# Altium PCB ArgoFC.PcbDoc (part 1 of 5)
Units mm, origin at the board's own origin, x right, y up, seen from the top; angles counter-clockwise.
Board outline 177.8 x 177.8 mm, 4 copper layers (Top Layer, GND Plane, PWR Plane, Bottom Layer), stack 0.603 mm thick; 373 components, 236 nets, 1289 pads, 686 vias.
Unrouted connection lines stored in the file: 16.
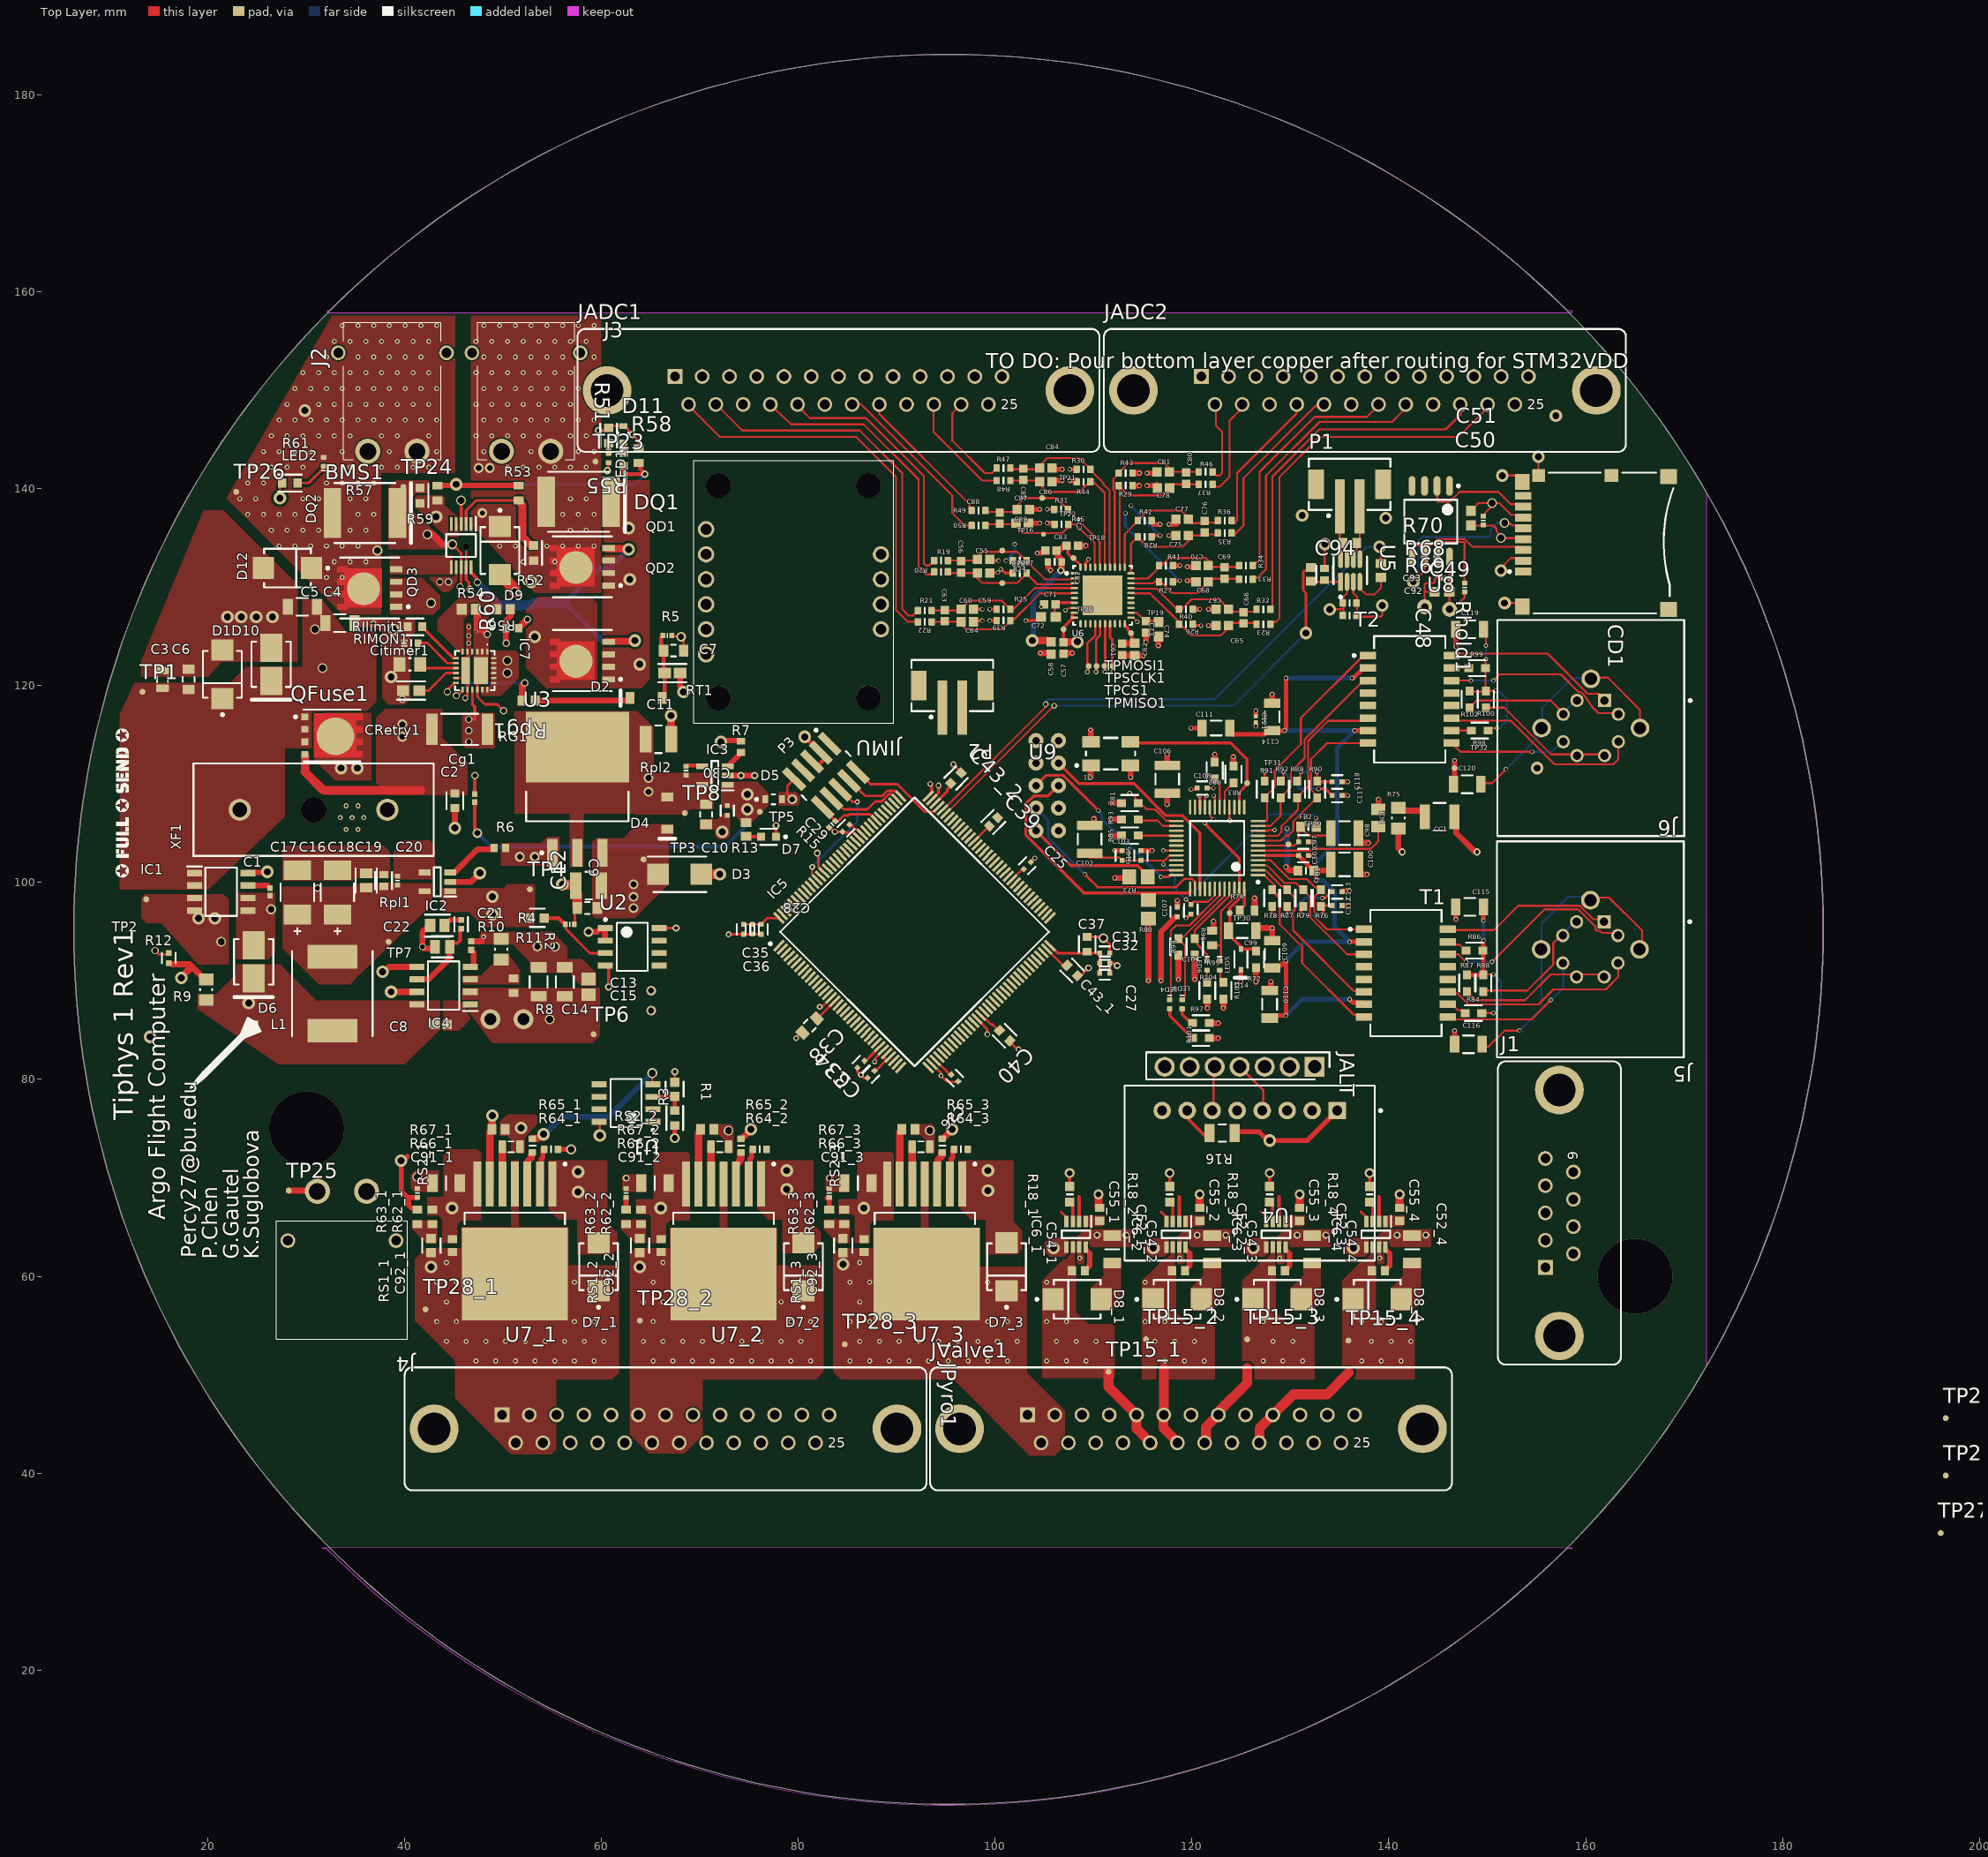
[diagram p0: Top Layer view]
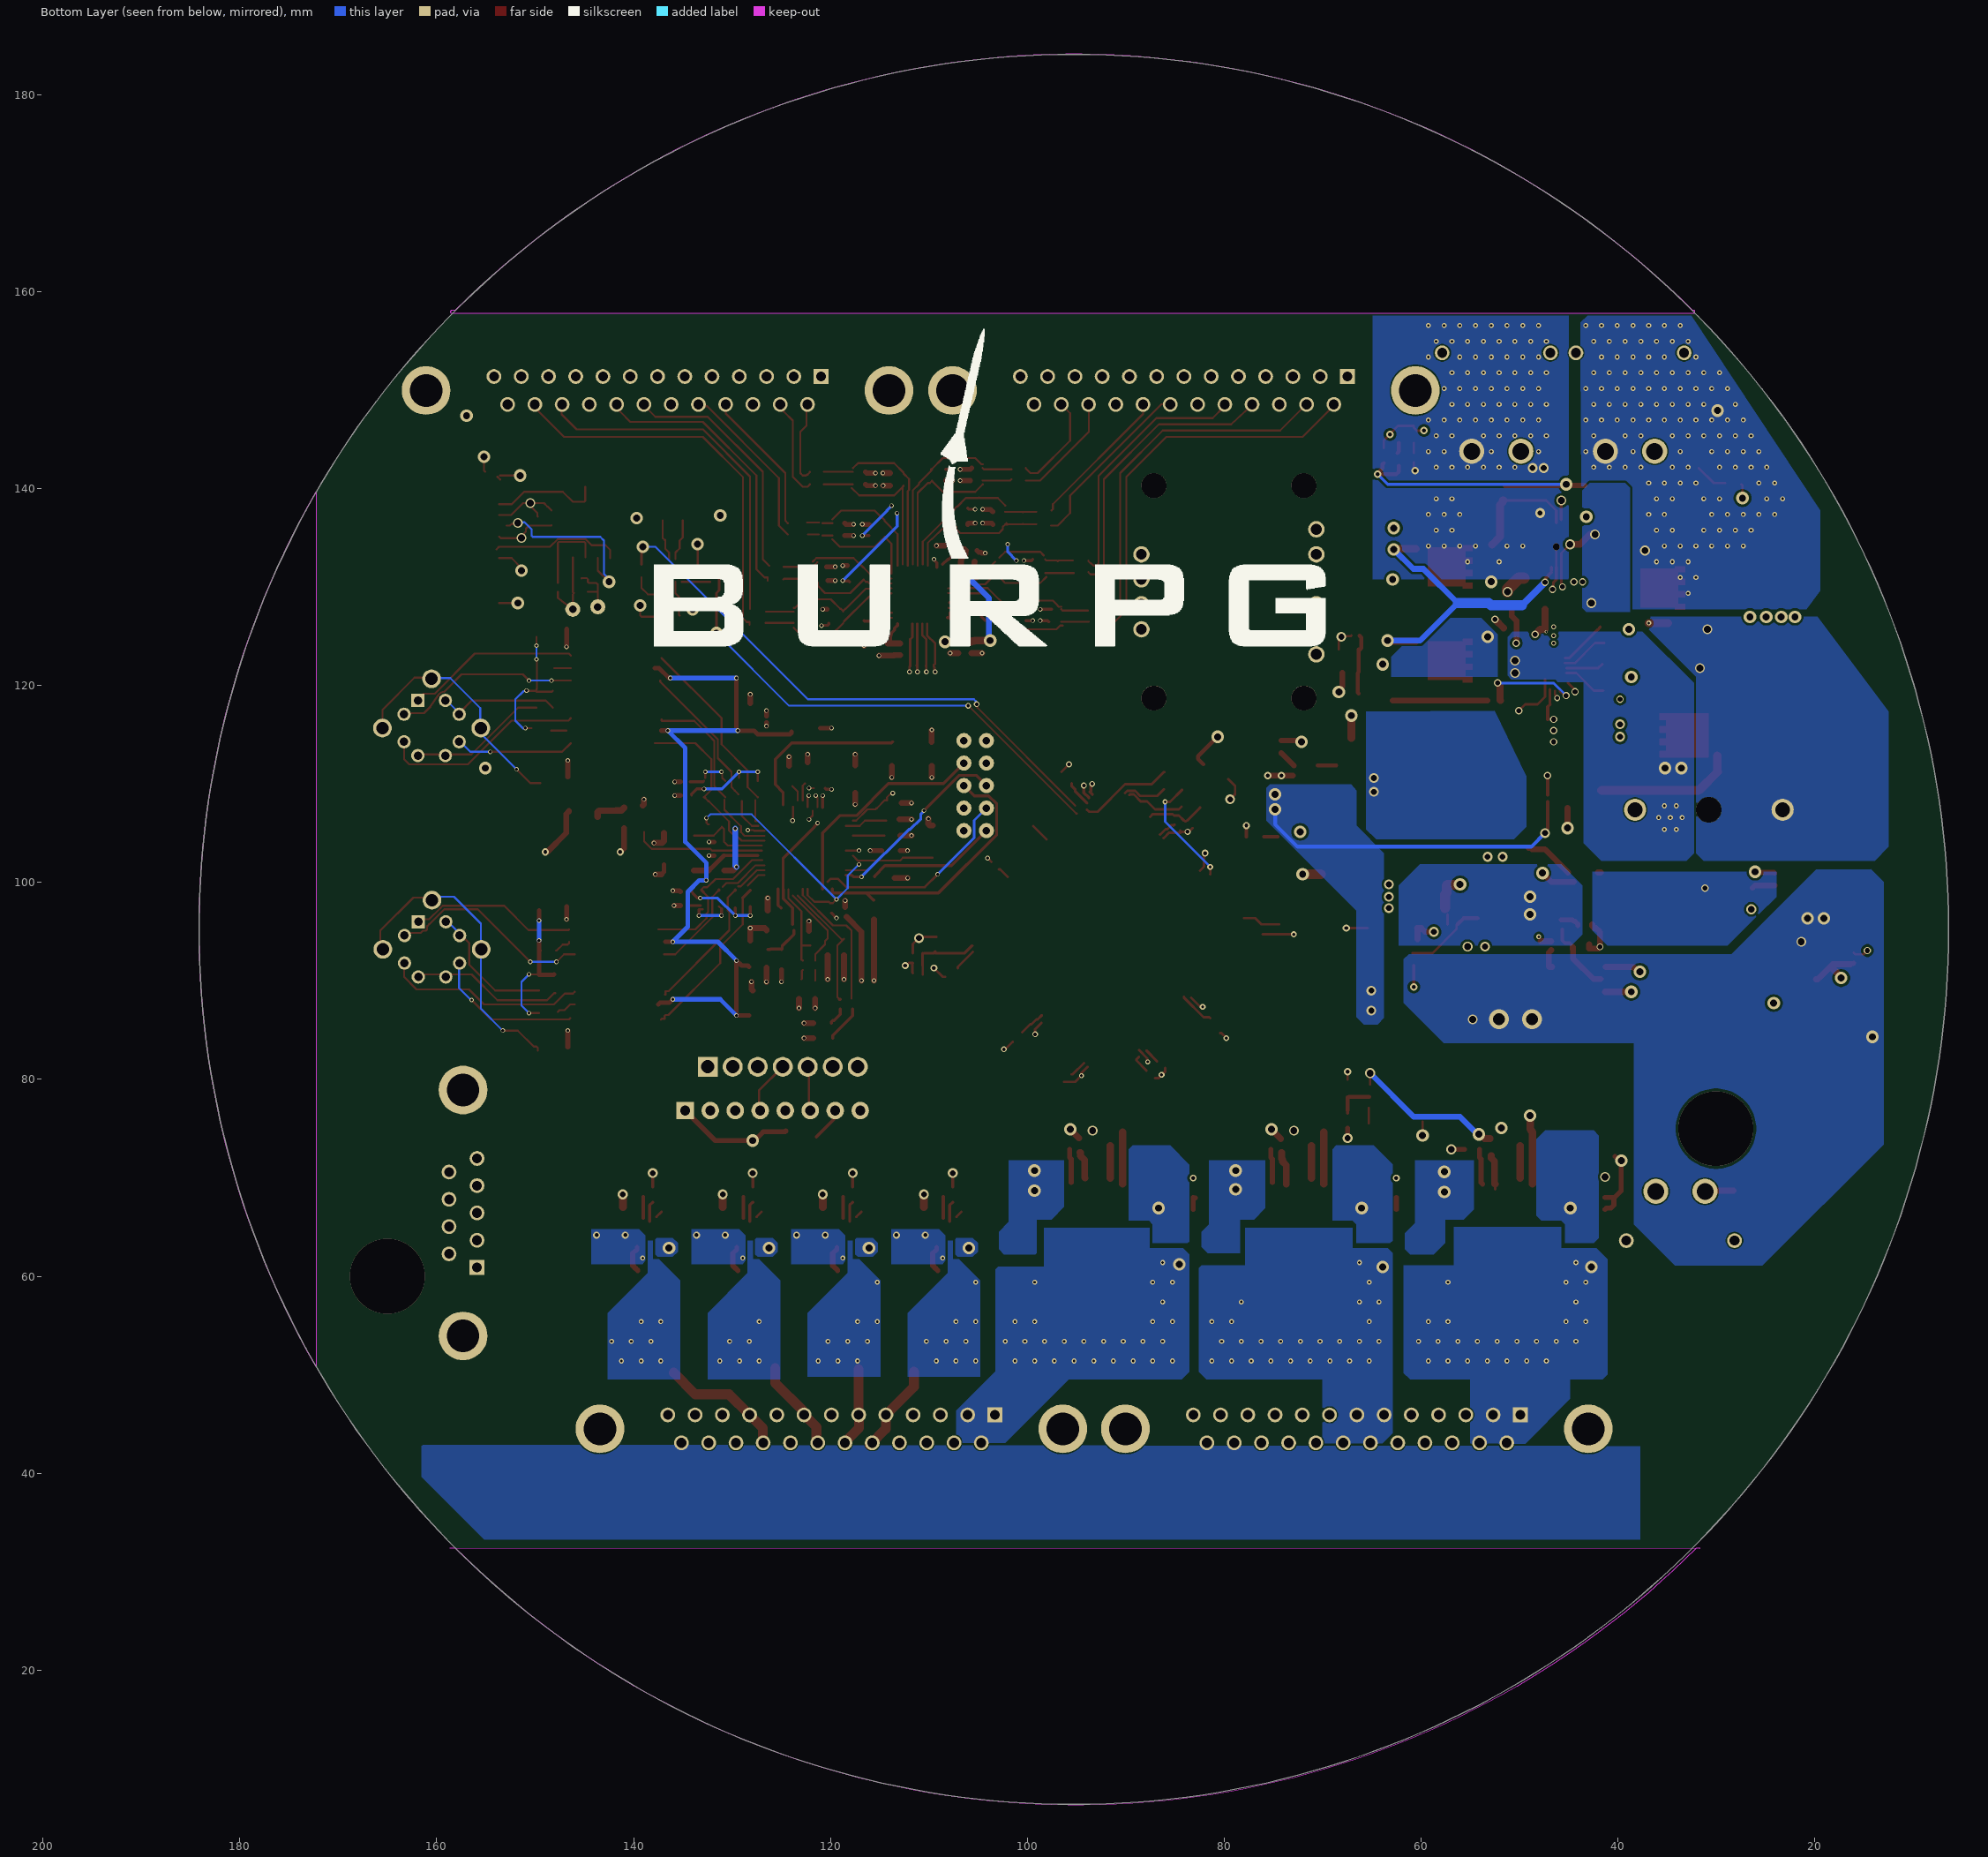
[diagram p1: Bottom Layer view, seen from below]
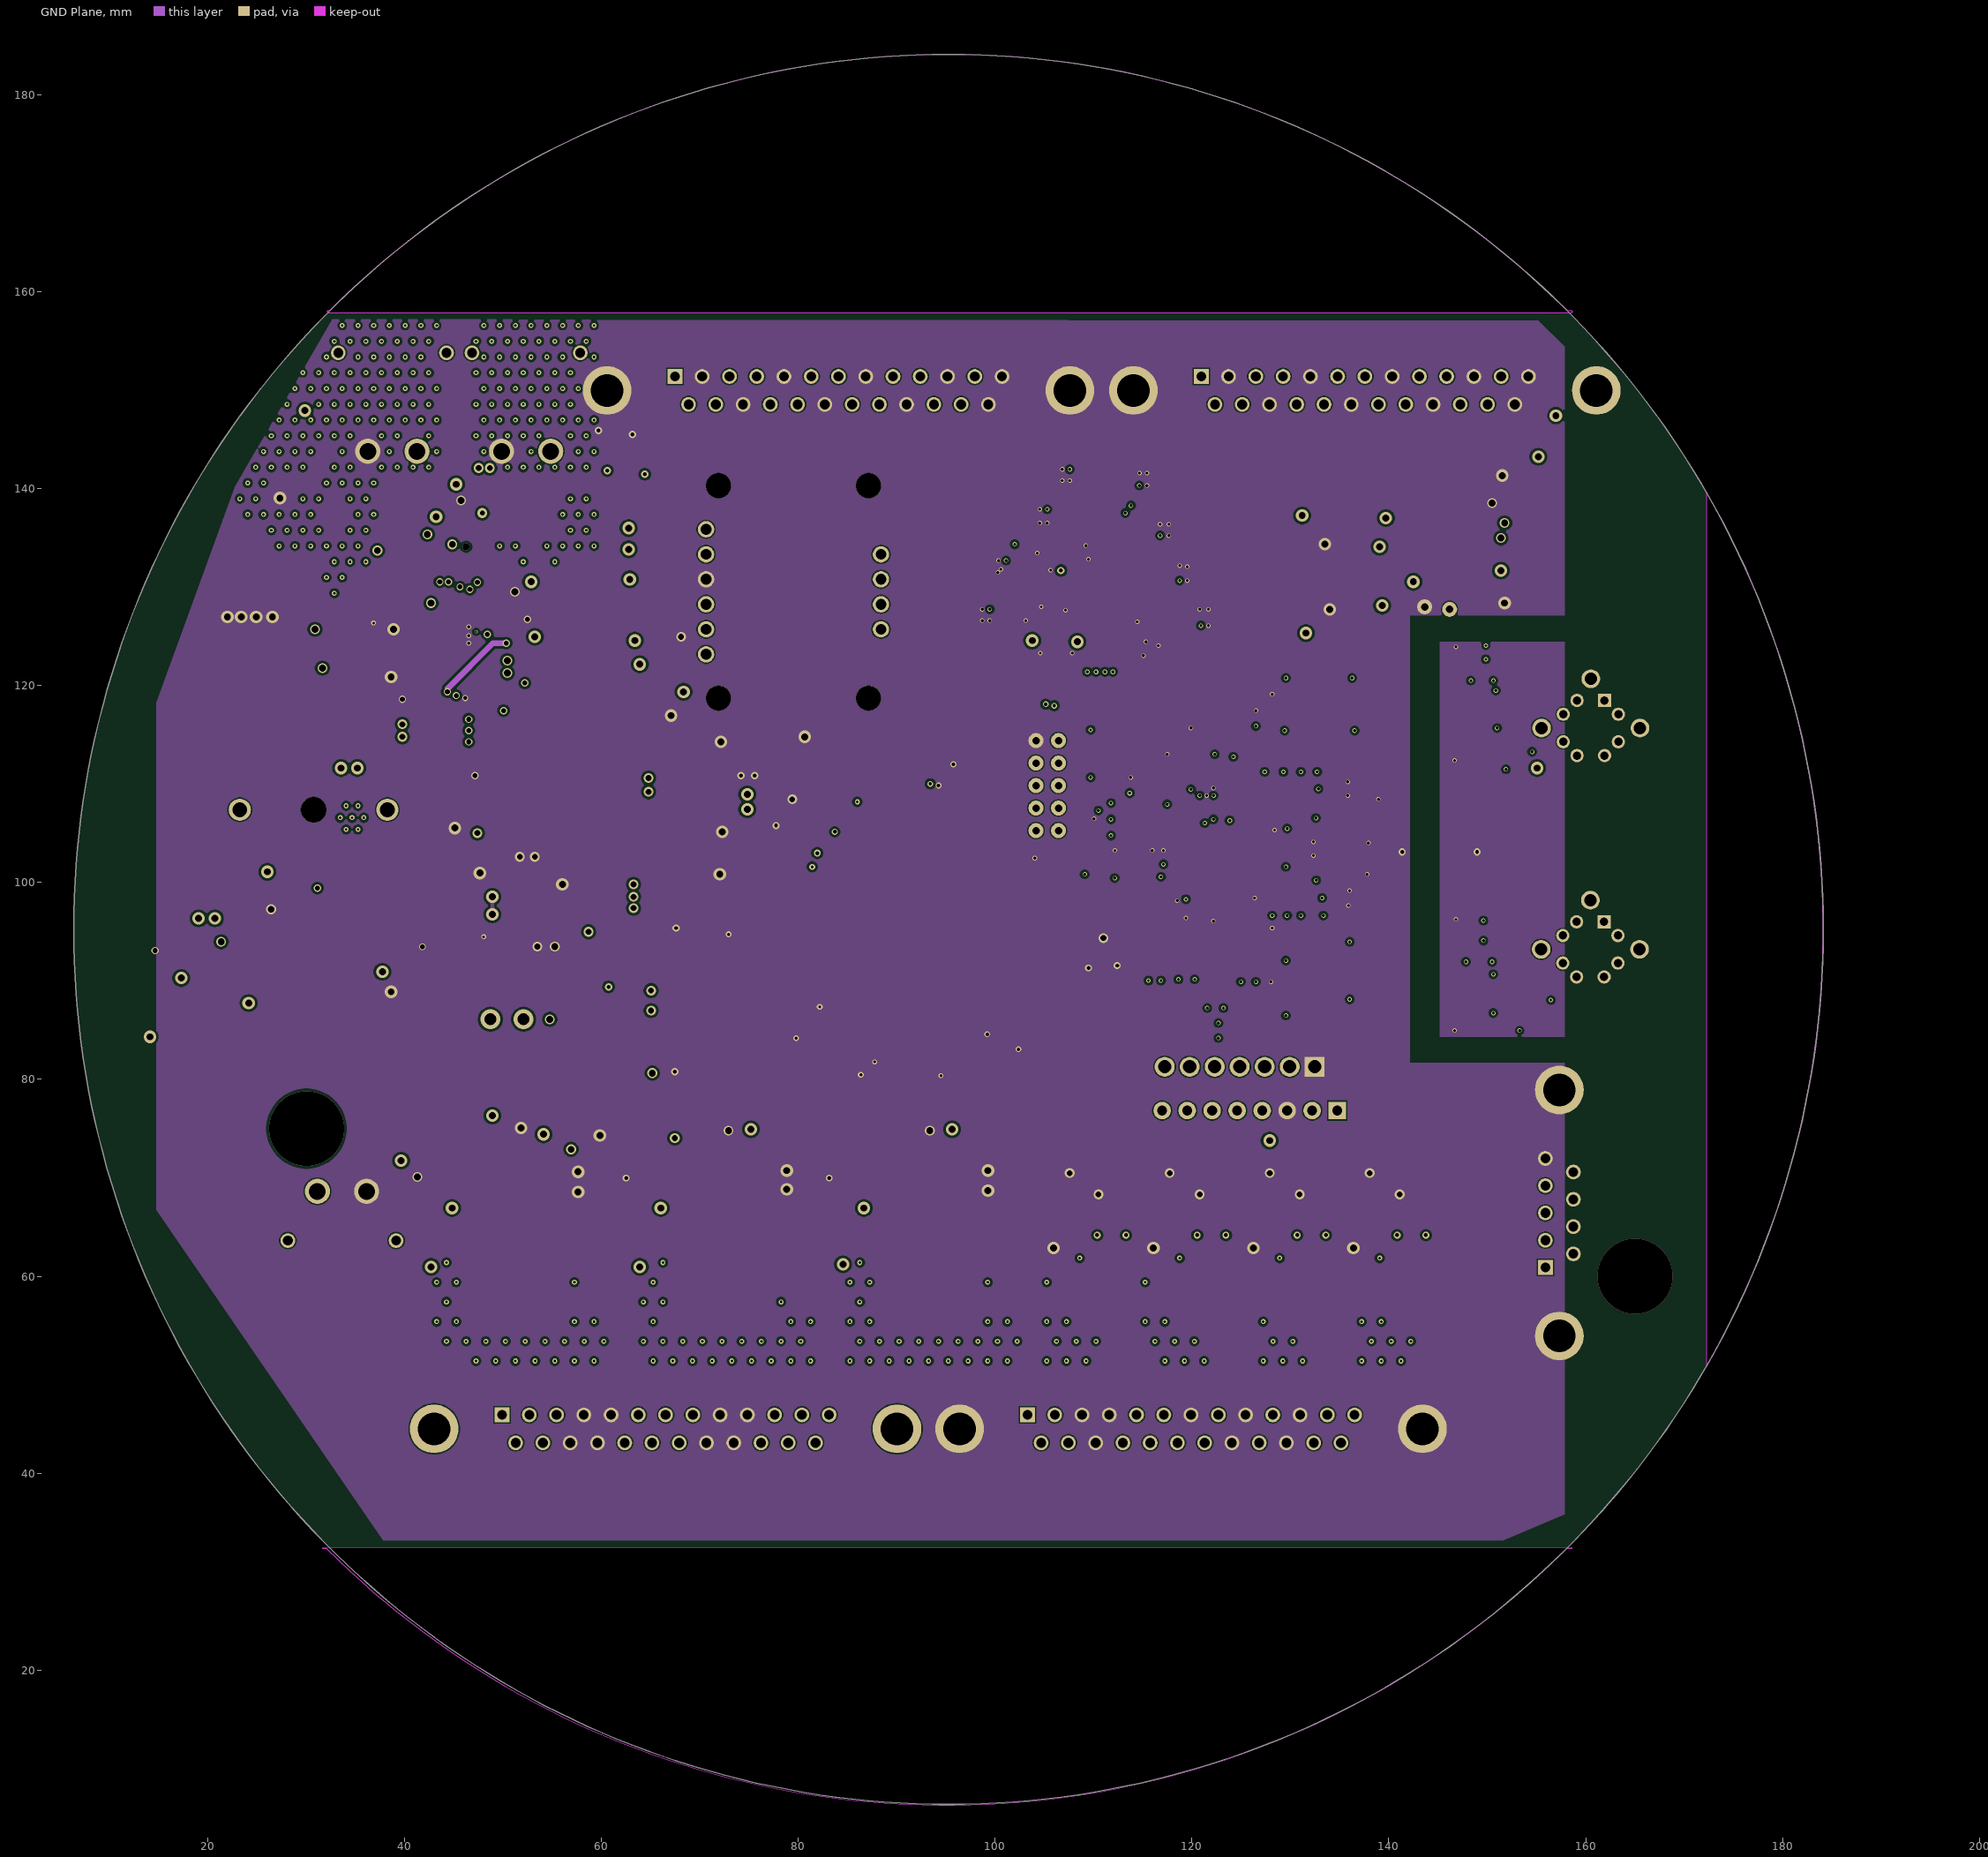
[diagram p2: GND Plane]
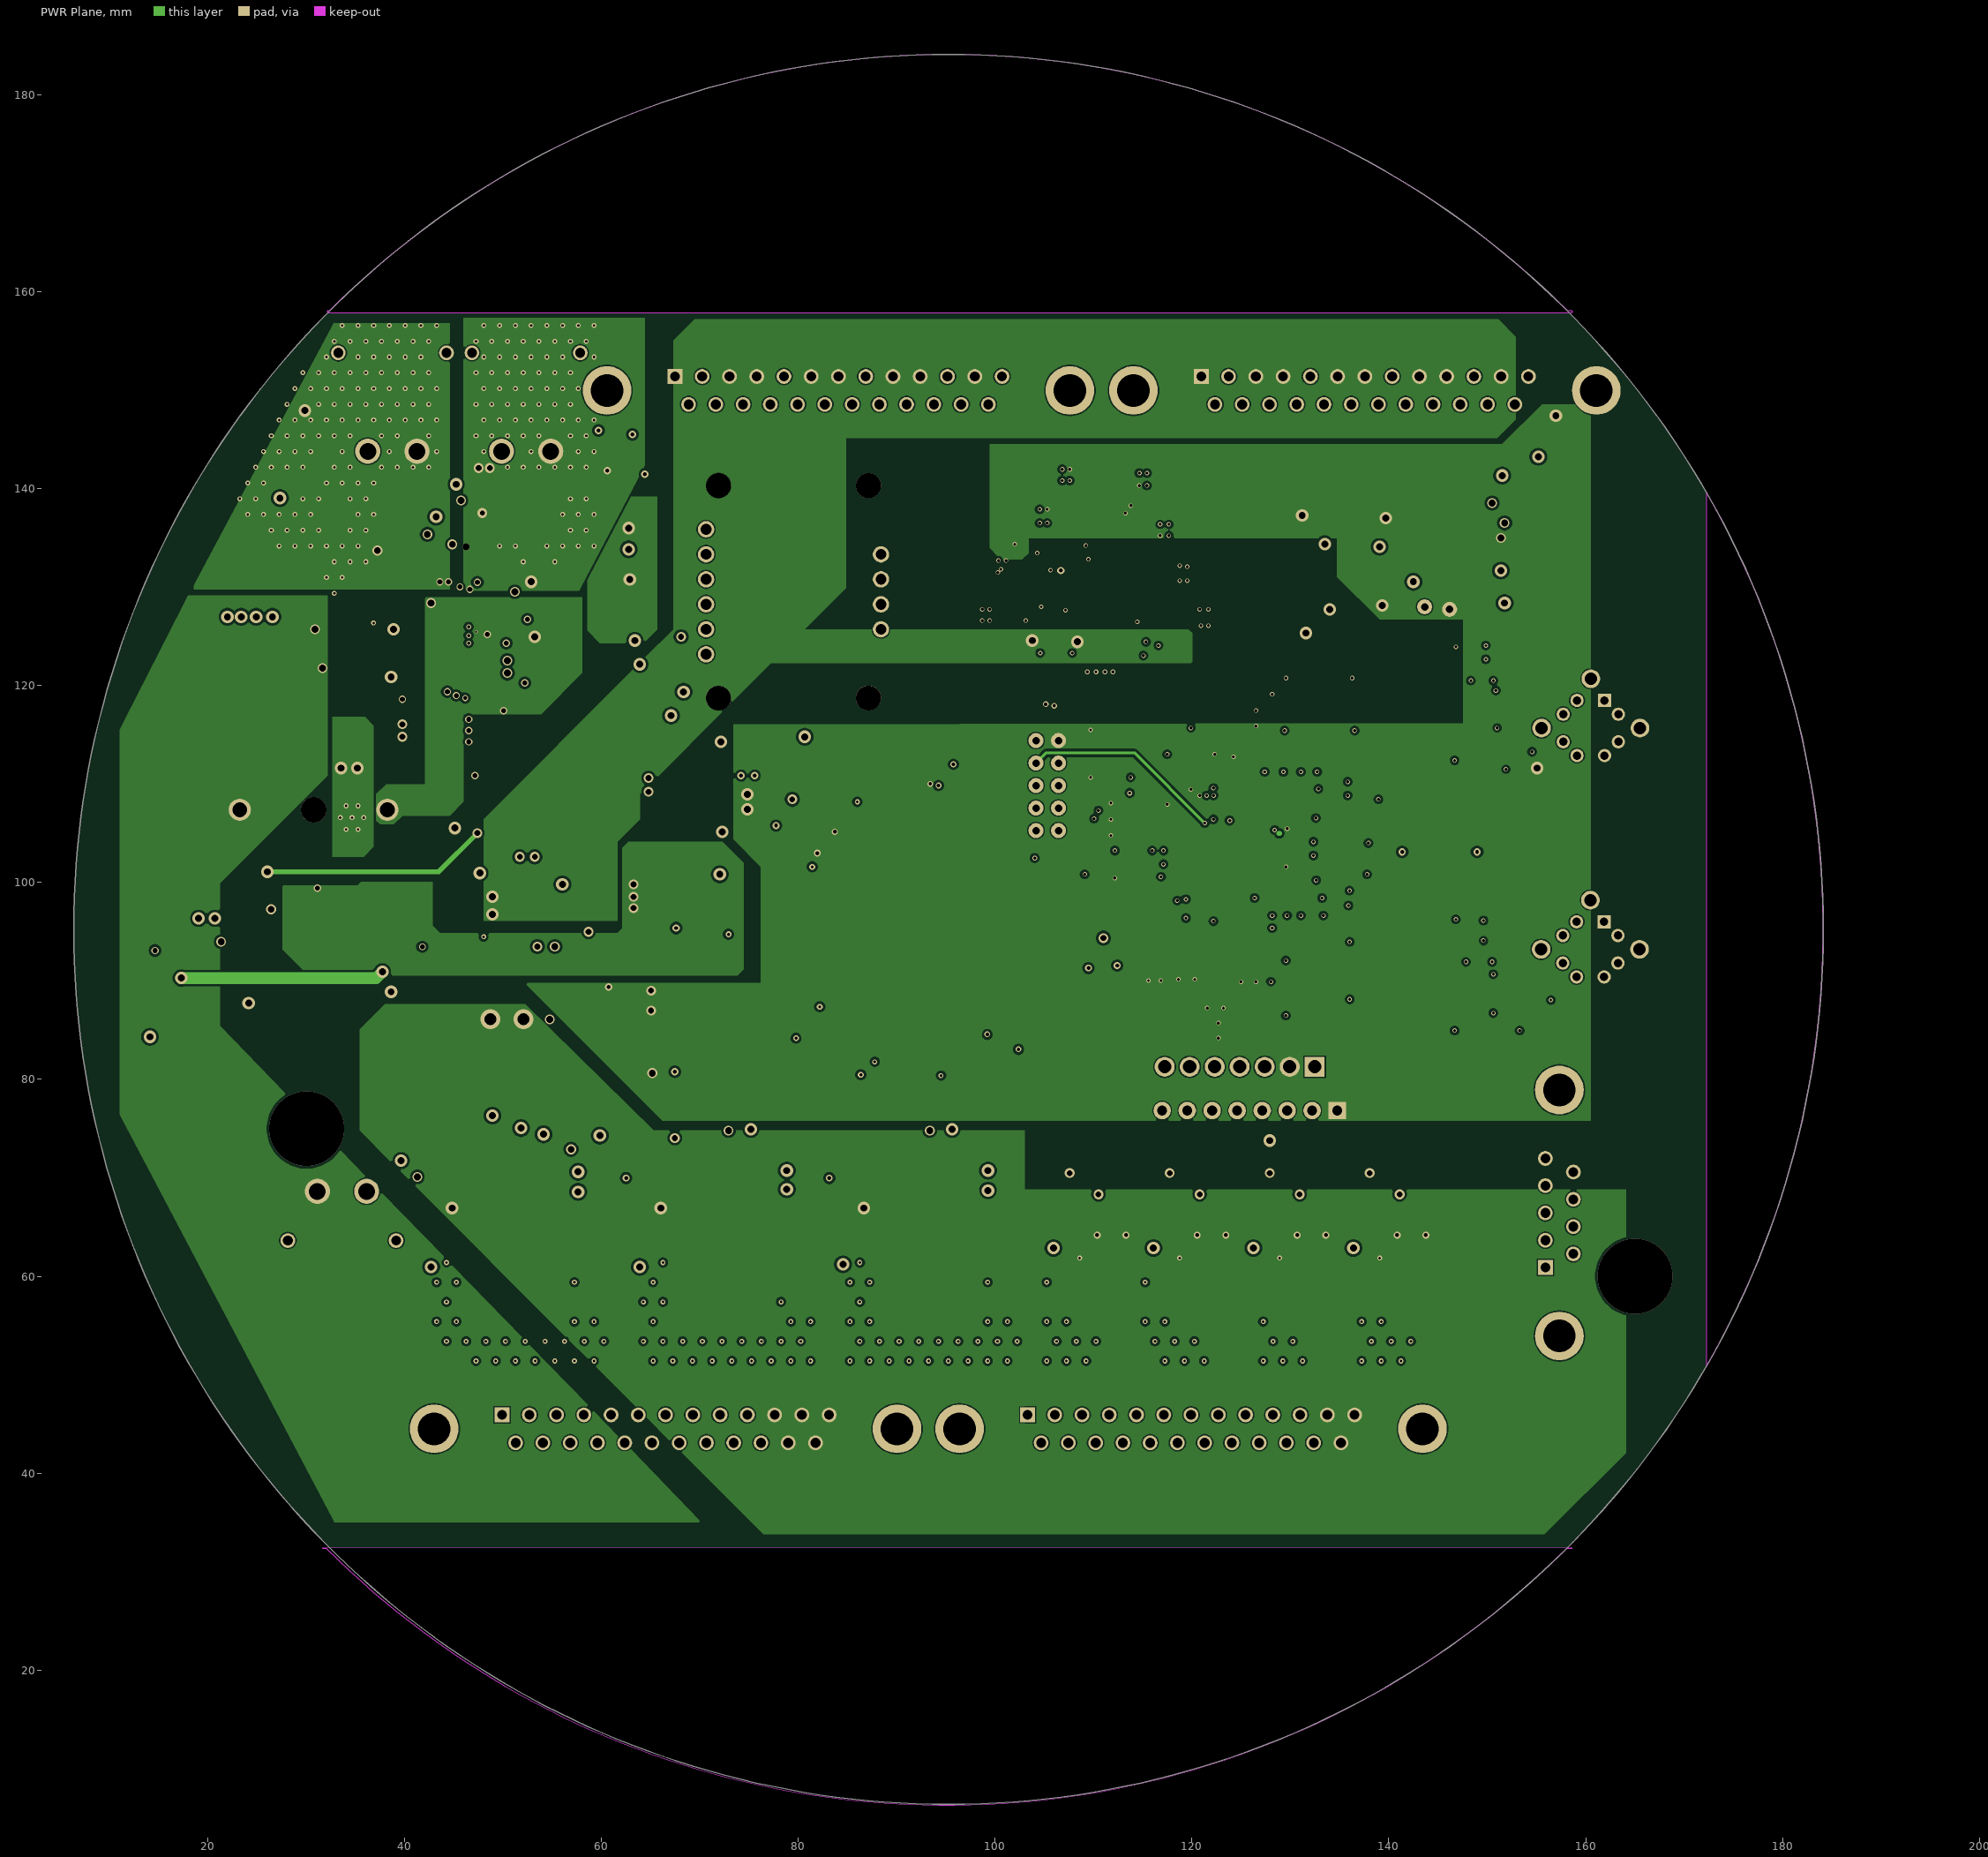
[diagram p3: PWR Plane]
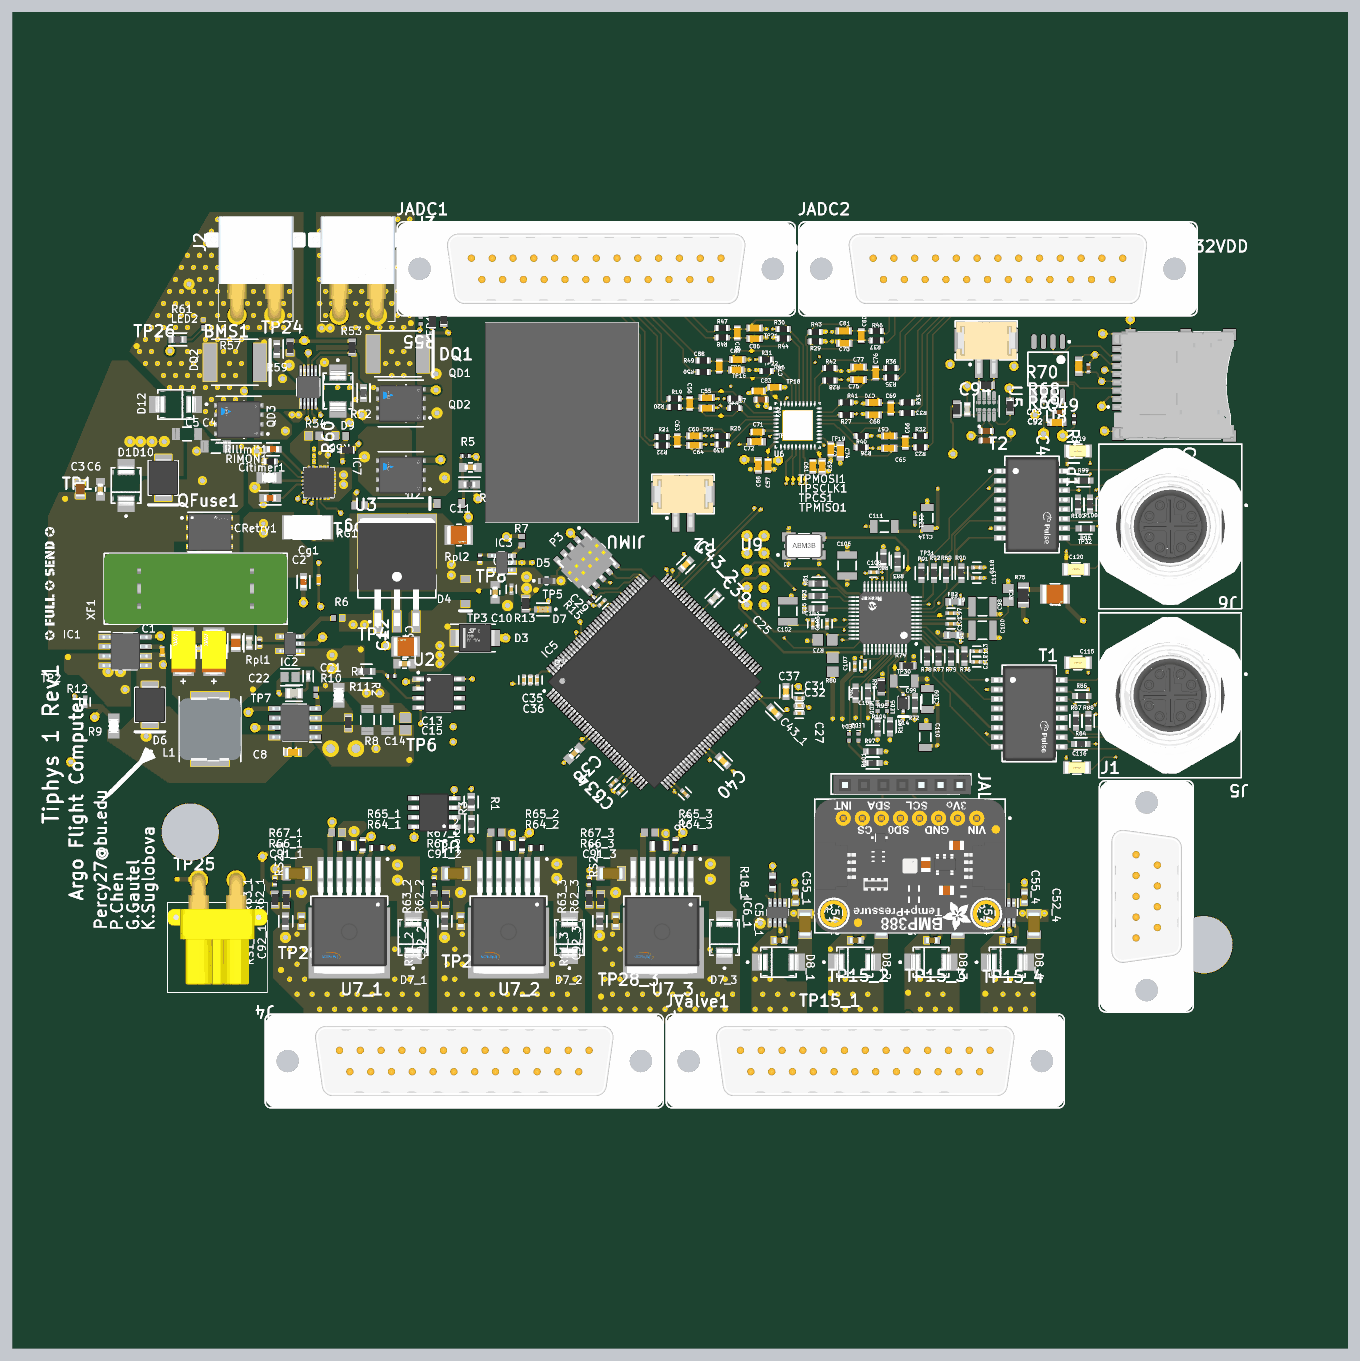
[diagram p7: 3D render of the assembled board from above, using the file's embedded part models]

## Layer stack, top to bottom
Top Solder: solder mask 0.0102, Solder Resist, Dk 3.5
Top Layer: signal copper 0.0356
Dielectric 2: prepreg 0.0711, PP-006, Dk 4.1
GND Plane: signal copper 0.035
Dielectric 1: dielectric 0.32, FR-4, Dk 4.8
PWR Plane: signal copper 0.035
Dielectric 3: prepreg 0.0711, PP-006, Dk 4.1
Bottom Layer: signal copper 0.0356
Bottom Solder: solder mask 0.0102, Solder Resist, Dk 3.5

## Board outline
6.35,95.25 ccw(c95.25,95.25) 95.25,6.35 ccw(c95.25,95.25) 184.15,95.25 ccw(c95.25,95.25) 95.25,184.15 ccw(c95.25,95.25)
cut-out: 31.619,32.377 32,32.377 ccw(c95.05,95.431) 158.101,32.377 158.619,32.377 158.619,32.403
cut-out: 172.25,50.817 ccw(c95.25,95.25) 172.25,139.683 172.25,139.69
cut-out: 32.258,157.861 cw(c32.258,157.988) 32.258,158.115 32.379,158.121 cw(c95.25,95.25) 158.121,158.121 158.124,158.115 158.496,158.115 cw(c158.496,157.988) 158.623,157.988 cw(c158.496,157.988) 158.496,157.861

## Design rules (kind name [scope] priority, off if disabled: settings)
Clearance [All] p1: gap=0.254 ignorepadtopadclearanceinfootprint=TRUE except(0: Arc-Hole Track-Hole SMDPad-Hole THPad-Hole Via-Hole Fill-Hole Poly-Hole Region-Hole Text-Hole; 0.089: Arc-Arc Arc-Track Track-Track; 0.127: Arc-SMDPad Arc-THPad Track-SMDPad Track-THPad SMDPad-SMDPad SMDPad-THPad SMDPad-Via SMDPad-Fill SMDPad-Poly SMDPad-Region SMDPad-Text THPad-THPad THPad-Via THPad-Fill THPad-Poly THPad-Region THPad-Text)
HoleSize [All] p1: absolutevalues=TRUE maxlimit=10 minlimit=0.25 maxpercent=80.000 minpercent=20.000
MinimumSolderMaskSliver [All] p1: minsoldermaskwidth=0.05
PlaneClearance [All] p1: clearance=0.6
PolygonConnect [All] p1: connectstyle=Direct reliefconductorwidth=0.254 reliefentries=4 polygonreliefangle="90 Angle" airgapwidth=0.254
RoomDefinition U_PowerManagementModule [InComponentClass('U_PowerManagementModule')] p1: confinementstyle=ConfineIn formatcopy=TRUE lockcomponents=FALSE outline 14.859,87.376 66.421,87.376 66.421,133.604 14.859,133.604
RoomDefinition FlashMemory [InComponentClass('FlashMemory')] p2: confinementstyle=ConfineIn formatcopy=TRUE lockcomponents=FALSE outline -24.765,-14.605 26.035,-14.605 26.035,10.795 -24.765,10.795
RoomDefinition Designator [InComponentClass('Designator')] p3: confinementstyle=ConfineIn formatcopy=TRUE lockcomponents=FALSE outline 142.748,134.239 158.369,134.239 158.369,157.099 142.748,157.099
RoomDefinition U_TopSheet [InComponentClass('U_TopSheet')] p4: confinementstyle=ConfineIn formatcopy=TRUE lockcomponents=FALSE outline 170.688,25.908 179.832,25.908 179.832,36.957 170.688,36.957
RoomDefinition U_STM32 [InComponentClass('U_STM32')] p5: confinementstyle=ConfineIn formatcopy=TRUE lockcomponents=FALSE outline 191.643,115.57 219.329,115.57 219.329,130.81 191.643,130.81
RoutingVias [All] p1: holewidth=0.5 width=0.75 viastyle="Through Hole" minholewidth=0.15 minwidth=0.25 maxholewidth=30 maxwidth=30
SilkToSilkClearance [All] p1: silktosilkclearance=0.1
SilkToSolderMaskClearance [IsPad] p1: minsilkscreentomaskgap=0.05 clearancetoexposedcopper=TRUE
SolderMaskExpansion [All] p1: expansion=0.102 istentingtop=FALSE
SupplyNets "Schematic Supply Nets_1" [InNet('GND')] p1: voltage=0.000
SupplyNets "Schematic Supply Nets_5" [InNet('STM32VDD')] p2: voltage=0.000
SupplyNets "Schematic Supply Nets_4" [InNet('VDDA3.3V_CLEAN')] p3: voltage=0.000
SupplyNets "Schematic Supply Nets_3" [InNet('CHASSIS')] p4: voltage=0.000
SupplyNets "Schematic Supply Nets" [InNet('24Vin')] p5: voltage=0.000
SupplyNets "Schematic Supply Nets_2" [InNet('5V')] p6: voltage=0.000
UnRoutedNet [All] p1: checkbadconnections=TRUE
Width [All] p1: maxlimit=8 minlimit=0.16 preferedwidth=0.5 toplayer_maxwidth=6.35 toplayer_prefwidth=0.2 midlayer1_minwidth=0.2 midlayer2_minwidth=0.2 bottomlayer_maxwidth=6.35 bottomlayer_prefwidth=0.2 minimp=50.000000 maximp=50.000000 favimp=50.000000
24 further rules are at their usual default settings.

## Classes and differential pairs
component class U_KSZ8863EthernetSwitch_RMII: 1 1 C97 C98 C99 C100 C101 C102 C103 C104 C105 C106 C107 C108 C109 C110 C111 C112 C113 C114 C115 C116 C117 C118 C119 C120 C121 CC1 D14 ENC1 FB1 FB2 J5 J6 LED3 LED4 LED5 LED6 R72 R73 R74 R75 R76 R77 R78 R79 R80 R81 R82 R83 R84 R85 R86 R87 R88 R89 R90 R91 R92 R93 R94 R95 R96 R97 R98 R99 R100 R101 R102 R103 R104 RC1 T1 T2 TP29 TP30 TP31 TP32 U9
component class U_TopSheet: P1
channel class 24VloadSwitch: PyroDriver1 PyroDriver2 PyroDriver3
component class PyroDriver3: C91_3 C92_3 D7_3 R62_3 R63_3 R64_3 R65_3 R66_3 R67_3 RS1_3 RS2_3 TP17_3 TP18_3 TP27_3 TP28_3 U7_3
component class PyroDriver2: C91_2 C92_2 D7_2 R62_2 R63_2 R64_2 R65_2 R66_2 R67_2 RS1_2 RS2_2 TP17_2 TP18_2 TP27_2 TP28_2 U7_2
component class PyroDriver1: C91_1 C92_1 D7_1 R62_1 R63_1 R64_1 R65_1 R66_1 R67_1 RS1_1 RS2_1 TP17_1 TP18_1 TP27_1 TP28_1 U7_1
component class BMS: BMS1 Cg1 Citimer1 CRetry1 D9 D10 D11 D12 DQ1 DQ2 IC7 J4 LED1 LED2 QD1 QD2 QD3 QFuse1 R51 R52 R53 R54 R55 R56 R57 R58 R59 R60 R61 RG1 RIlimit1 RIMON1 Rlim1 Rpg1 TP23 TP24 TP25 TP26 TPQA1 TPQB1 TPQC1 TPQD1 XF1
channel class CCSolenoidDriver: SolenoidDriver1 SolenoidDriver2 SolenoidDriver3 SolenoidDriver4
component class U_STM32: C25 C26 C27 C28 C29 C30 C31 C32 C33 C34 C35 C36 C37 C38 C39 C40 C43_1 C43_2 D7 IC5 JALT JIMU R13 R15 R16 R17 TP9 U4
component class AD7173adcModule: C55 C56 C57 C58 C59 C60 C61 C62 C63 C64 C65 C66 C67 C68 C69 C70 C71 C72 C73 C74 C75 C76 C77 C78 C79 C80 C81 C82 C83 C84 C85 C86 C87 C88 C89 R19 R20 R21 R22 R23 R24 R25 R26 R27 R28 R29 R30 R31 R32 R33 R34 R35 R36 R37 R38 R39 R40 R41 R42 R43 R44 R45 R46 R47 R48 R49 R50 TP16 TP17 TP18 TP19 TP20 TP21 TP22 TPCS1 TPMISO1 TPMOSI1 TPSCLK1 U6
component class U_PowerManagementModule: C1 C2 C3 C4 C5 C6 C7 C8 C9 C10 C11 C12 C13 C14 C15 C16 C17 C18 C19 C20 C21 C22 C23 D1 D2 D3 D4 D5 D6 IC1 IC2 IC3 IC4 L1 R1 R2 R3 R4 R5 R6 R7 R8 R9 R10 R11 R12 Rpl1 Rpl2 RT1 TP1 TP2 TP3 TP4 TP5 TP6 TP7 TP8 U1 U2 U3
component class SolenoidDriver4: C45_4 C52_4 C54_4 C55_4 D1_SolenoidDriver4 D8_4 IC6_4 Q1_SolenoidDriver4 R18_4 R30_SolenoidDriver4 TP15_4
component class SolenoidDriver3: C45_3 C52_3 C54_3 C55_3 D1_SolenoidDriver3 D8_3 IC6_3 Q1_SolenoidDriver3 R18_3 R30_SolenoidDriver3 TP15_3
component class SolenoidDriver2: C45_2 C52_2 C54_2 C55_2 D1_SolenoidDriver2 D8_2 IC6_2 Q1_SolenoidDriver2 R18_2 R30_SolenoidDriver2 TP15_2
component class SolenoidDriver1: C45_1 C52_1 C54_1 C55_1 D1_SolenoidDriver1 D8_1 IC6_1 Q1_SolenoidDriver1 R18_1 R30_SolenoidDriver1 TP15_1
component class FlashMemory: C48 C49 C50 C51 CD1 Rhold1 U5
component class Designator: C92 C93 C94 J9 R68 R69 R70 U8

## Components (designator, comment, footprint, x,y, rotation, side; value= is the part's Value field where it differs from the comment)
1 "" ABRA-ABM3B-4_V 111.728,113.1 r0 top (schematic designator 1)
BMS1 "LTC4416EMS-1#PBF" SOP50P490X110-10N 45.72,134.239 r270 top
C1 "Capacitor 0.1 uF +/- 5% 16 V 0402" CAPC1005X56X25LL10T15 26.289,99.06 r90 top value=100nF
C2 "Capacitor 0.1 uF +/- 5% 16 V 0402" CAPC1005X56X25LL10T15 47.117,108.585 r90 top value=100nF
C3 "100nF" FP-CGA3E-0_3-0_1-IPC_A 18.034,120.65 r90 top
C4 "10uF" FP-GRM31-0_2-MFG 33.401,126.365 r180 top
C5 "10uF" FP-GRM31-0_2-MFG 29.591,128.016 r0 top
C6 "Capacitor 47µF +/-40% 6.3V 0805" CAPC0805(2012)145_L 15.367,120.65 r270 top value=47µF
C7 "100nF" FP-CGA3E-0_3-0_1-IPC_A 67.31,123.571 r0 top
C8 "Capacitor 100 nF +/-10% 50 V 0603" CAPC1608X90X40NL10T20 43.688,85.598 r180 top value=100nF
C9 "100nF" FP-CGA3E-0_3-0_1-IPC_A 58.547,97.409 r180 top
C10 "100nF" FP-CGA3E-0_3-0_1-IPC_A 70.612,106.934 r270 top
C11 "47uF" FP-C1210C476M4PACTU-MFG 65.786,114.554 r0 top
C12 "47uF" FP-C1210C476M4PACTU-MFG 58.674,99.695 r180 top
C13 "10uF" FP-GRM31-0_2-MFG 56.261,89.916 r90 top
C14 "10uF" FP-GRM31-0_2-MFG 53.594,89.916 r270 top
C15 "100nF" CAPC2013X100X50NL20T25 58.674,89.408 r270 top
C16 "100UF" FP-TPSC-MFG 33.147,99 r270 top
C17 "100UF" FP-TPSC-MFG 29.083,99 r270 top
C18 "10uF" FP-GRM21B-0_1-IPC_C 36.068,100.203 r90 top
C19 "820pF" FP-C0603C-CF-MFG 37.846,100.203 r90 top value="820 pF"
C20 "10pF" FP-C0805C-DN-MFG 43.815,93.472 r180 top value="10 pF"
C21 "8.2nF" CAPC1005X55X25NL05T10 46.736,93.599 r270 top
C22 "2.2nF" FP-CL21-IPC_C 43.307,95.631 r180 top
C25 "100nF" FP-CC0402-MFG 103.251,101.727 r45 top value="100 nF"
C26 "100nF" FP-CC0402-MFG 95.885,80.137 r315 top value="100 nF"
C27 "100nF" FP-CC0402-MFG 111.125,92.837 r0 top value="100 nF"
C28 "100nF" FP-CC0402-MFG 76.2,95.25 r270 top value="100 nF"
C29 "100nF" FP-CC0402-MFG 84.836,105.537 r45 top value="100 nF"
C30 "100nF" FP-CC0402-MFG 72.771,107.315 r270 top value="100 nF"
C31 "100nF" FP-CC0402-MFG 111.125,91.821 r0 top value="100 nF"
C32 "100nF" FP-CC0402-MFG 111.125,90.805 r0 top value="100 nF"
C33 "100nF" FP-CC0402-MFG 87.376,80.518 r225 top value="100 nF"
C34 "100nF" FP-CC0402-MFG 86.36,81.534 r225 top value="100 nF"
C35 "100nF" FP-CC0402-MFG 75.311,95.258 r270 top value="100 nF"
C36 "100nF" FP-CC0402-MFG 74.422,95.25 r270 top value="100 nF"
C37 "22uF" FP-CC0603-DA-MFG 109.347,93.726 r90 top value="2.2 uF"
C38 "100nF" FP-CGA3E-0_3-0_1-IPC_A 81.153,85.471 r225 top
C39 "2.2pF" FP-C0603C-CF-MFG 99.822,106.172 r45 top value="2.2 pF"
C40 "CC0603MRX5R6BB225" FP-CC0603-DA-MFG 100.965,84.455 r315 top value="2.2 uF"
C43_1 "2.2uF" FP-CC0603-DA-MFG 107.823,91.059 r315 top value="2.2 uF"
C43_2 "2.2uF" FP-CC0603-DA-MFG 96.012,110.617 r45 top value="2.2 uF"
C48 "Capacitor 100nF +/-20% 25V 0402" CAPC0402(1005)60_L 145.738,130.937 r180 top value=100nF
C49 "Capacitor 1 uF +/- 10% 16 V 0603" CAPC1608X94X35NL15T15 145.403,129.54 r180 top value=1µF
C50 "Capacitor 100nF +/-20% 25V 0402" CAPC0402(1005)60_L 149.606,136.779 r90 top value=100nF
C51 "Capacitor 1 uF +/- 10% 16 V 0603" CAPC1608X94X35NL15T15 148.336,137.033 r90 top value=1µF
C52_1 "100nF" CAPC1608X90N 110.617,66.294 r270 top (schematic designator C52)
C52_2 "100nF" CAPC1608X90N 120.777,66.294 r270 top (schematic designator C52)
C52_3 "100nF" CAPC1608X90N 130.937,66.294 r270 top (schematic designator C52)
C52_4 "100nF" CAPC1608X90N 141.097,66.294 r270 top (schematic designator C52)
C54_1 "100nF" CAPC1608X90N 108.458,60.579 r180 top (schematic designator C53)
C54_2 "100nF" CAPC1608X90N 118.618,60.579 r180 top (schematic designator C53)
C54_3 "100nF" CAPC1608X90N 128.778,60.579 r180 top (schematic designator C53)
C54_4 "100nF" CAPC1608X90N 138.938,60.579 r180 top (schematic designator C53)
C55 "Capacitor 100 nF +/-10% 50 V 0603" CAPC1608X90X40NL10T20 98.806,132.842 r0 top value=10nF
C55_1 "1uF" CAPC3216X180N 111.887,62.738 r90 top (schematic designator C54)
C55_2 "1uF" CAPC3216X180N 122.047,62.738 r90 top (schematic designator C54)
C55_3 "1uF" CAPC3216X180N 132.207,62.738 r90 top (schematic designator C54)
C55_4 "1uF" CAPC3216X180N 142.367,62.738 r90 top (schematic designator C54)
C56 "Capacitor 1 uF +/- 10% 25 V 0603" CAPC1608X90X40LL10T20 96.52,132.08 r270 top value=0.1µF
C57 "Capacitor 1 uF +/- 10% 25 V 0603" CAPC1608X90X40LL10T20 106.934,123.825 r270 top value=0.1µF
C58 "Capacitor 100 nF +/-10% 50 V 0603" CAPC1608X90X40NL10T20 105.664,123.825 r270 top value=10nF
C59 "Capacitor 100 nF +/-10% 50 V 0603" CAPC1608X90X40NL10T20 98.806,131.445 r0 top value=10nF
C60 "Capacitor 100 nF +/-10% 50 V 0603" CAPC1608X90X40NL10T20 97.155,127.762 r0 top value=10nF
C61 "Capacitor 1 uF +/- 10% 25 V 0603" CAPC1608X90X40LL10T20 112.903,123.698 r270 top value=0.1µF
C62 "Capacitor 100 nF +/-10% 50 V 0603" CAPC1608X90X40NL10T20 114.173,123.698 r270 top value=10nF
C63 "Capacitor 1 uF +/- 10% 25 V 0603" CAPC1608X90X40LL10T20 94.869,127.127 r270 top value=0.1µF
C64 "Capacitor 100 nF +/-10% 50 V 0603" CAPC1608X90X40NL10T20 97.155,126.492 r0 top value=10nF
C65 "Capacitor 100 nF +/-10% 50 V 0603" CAPC1608X90X40NL10T20 123.063,126.111 r180 top value=10nF
C66 "Capacitor 1 uF +/- 10% 25 V 0603" CAPC1608X90X40LL10T20 125.25,126.898 r90 top value=0.1µF
C67 "Capacitor 100 nF +/-10% 50 V 0603" CAPC1608X90X40NL10T20 123.063,127.762 r180 top value=10nF
C68 "Capacitor 100 nF +/-10% 50 V 0603" CAPC1608X90X40NL10T20 121.031,130.556 r180 top value=10nF
C69 "Capacitor 1 uF +/- 10% 25 V 0603" CAPC1608X90X40LL10T20 123.305,131.445 r90 top value=0.1µF
C70 "Capacitor 100 nF +/-10% 50 V 0603" CAPC1608X90X40NL10T20 121.031,132.207 r180 top value=10nF
C71 "Capacitor 1 uF +/- 10% 25 V 0603" CAPC1608X90X40LL10T20 105.537,128.27 r180 top value=0.1µF
C72 "Capacitor 1 uF +/- 10% 16 V 0603" CAPC1608X94X35NL15T15 105.41,127 r180 top value=1µF
C73 "Capacitor 1 uF +/- 10% 25 V 0603" CAPC1608X90X40LL10T20 115.316,125.984 r270 top value=0.1µF
C74 "Capacitor 1 uF +/- 10% 16 V 0603" CAPC1608X94X35NL15T15 116.586,125.73 r270 top value=1µF
C75 "Capacitor 100 nF +/-10% 50 V 0603" CAPC1608X90X40NL10T20 118.999,135.255 r180 top value=10nF
C76 "Capacitor 1 uF +/- 10% 25 V 0603" CAPC1608X90X40LL10T20 121.285,136.144 r90 top value=0.1µF
C77 "Capacitor 100 nF +/-10% 50 V 0603" CAPC1608X90X40NL10T20 118.999,136.906 r180 top value=10nF
C78 "Capacitor 100 nF +/-10% 50 V 0603" CAPC1608X90X40NL10T20 117.094,140.081 r180 top value=10nF
C79 "Capacitor 1 uF +/- 10% 25 V 0603" CAPC1608X90X40LL10T20 105.664,133.731 r180 top value=0.1µF
C80 "Capacitor 1 uF +/- 10% 25 V 0603" CAPC1608X90X40LL10T20 119.38,141.097 r90 top value=0.1µF
C81 "Capacitor 100 nF +/-10% 50 V 0603" CAPC1608X90X40NL10T20 117.064,141.732 r180 top value=10nF
C82 "Capacitor 4.7µF +/-20% 10V 0603" CAPC0603(1608)100_L 106.045,132.588 r180 top value=4.7µF
C83 "Capacitor 1 uF +/- 10% 25 V 0603" CAPC1608X90X40LL10T20 107.823,134.239 r0 top value=0.1µF
C84 "Capacitor 100 nF +/-10% 50 V 0603" CAPC1608X90X40NL10T20 105.156,142.113 r0 top value=10nF
C85 "Capacitor 1 uF +/- 10% 25 V 0603" CAPC1608X90X40LL10T20 102.87,141.478 r270 top value=0.1µF
C86 "Capacitor 100 nF +/-10% 50 V 0603" CAPC1608X90X40NL10T20 105.156,140.716 r0 top value=10nF
C87 "Capacitor 100 nF +/-10% 50 V 0603" CAPC1608X90X40NL10T20 102.87,137.922 r0 top value=10nF
C88 "Capacitor 1 uF +/- 10% 25 V 0603" CAPC1608X90X40LL10T20 100.457,137.033 r270 top value=0.1µF
C89 "Capacitor 100 nF +/-10% 50 V 0603" CAPC1608X90X40NL10T20 102.743,136.525 r0 top value=10nF
C91_1 "1uF" CAPC3216X180N 44.196,69.469 r0 top (schematic designator C90)
C91_2 "1uF" CAPC3216X180N 65.405,69.469 r0 top (schematic designator C90)
C91_3 "1uF" CAPC3216X180N 86.052,69.469 r0 top (schematic designator C90)
C92 "Capacitor 10µF +/-20% 10V 0603" CAPC0603(1608)100_L 136.017,128.397 r180 top value=0.1µF
C92_1 "100nF" CAPC1608X90N 44.831,63.119 r90 top (schematic designator C91)
C92_2 "100nF" CAPC1608X90N 66.04,63.119 r90 top (schematic designator C91)
C92_3 "100nF" CAPC1608X90N 86.687,63.119 r90 top (schematic designator C91)
C93 "Capacitor 10µF +/-20% 10V 0603" CAPC0603(1608)100_L 136.017,127.127 r180 top value=2.2µF
C94 "2.2pF" FP-C0603C-CF-MFG 133.477,131.318 r90 top value="2.2 pF"
C97 "0.1µF" FP-CC0402-MFG 131.318,104.14 r0 top value="100 nF"
C98 "22uF" CAPC1210(3225)280_L 135.509,105.029 r180 top
C99 "10µF" CAPC1206(3216)190_L 125.095,95.123 r180 top value=10uF
C100 "22uF" CAPC1210(3225)280_L 135.509,101.854 r180 top
C101 "0.1µF" FP-CC0402-MFG 131.318,102.743 r0 top value="100 nF"
C102 "22uF" CAPC1210(3225)280_L 109.601,104.394 r90 top
C103 "0.1µF" FP-CC0402-MFG 112.903,102.743 r90 top value="100 nF"
C104 "0.1µF" FP-CC0402-MFG 119.888,97.282 r270 top value="100 nF"
C105 "0.1µF" FP-CC0402-MFG 114.808,102.743 r90 top value="100 nF"
C106 "22uF" CAPC1210(3225)280_L 117.475,110.49 r270 top
C107 "0.1µF" FP-CC0402-MFG 118.491,97.028 r90 top value="100 nF"
C108 "0.1µF" FP-CC0402-MFG 121.031,109.601 r0 top value="100 nF"
C109 "10µF" CAPC1206(3216)190_L 128.143,92.71 r270 top value=10uF
C110 "10µF" CAPC1206(3216)190_L 127.889,87.63 r270 top value=10uF
C111 "10µF" CAPC1206(3216)190_L 122.428,115.697 r0 top value=10uF
C112 "0.1µF" FP-CC0402-MFG 134.747,97.663 r0 top value="100 nF"
C113 "0.1µF" FP-CC0402-MFG 134.747,99.06 r0 top value="100 nF"
C114 "10µF" CAPC1206(3216)190_L 128.143,116.84 r270 top value=10uF
C115 "1000pF" FP-C1206C-EF-MFG 148.209,97.536 r180 top
C116 "1000pF" FP-C1206C-EF-MFG 148.082,83.566 r180 top
C117 "0.1µF" FP-CC0402-MFG 134.747,108.839 r0 top value="100 nF"
C118 "0.1µF" FP-CC0402-MFG 134.747,110.236 r0 top value="100 nF"
C119 "1000pF" FP-C1206C-EF-MFG 148.209,125.73 r180 top
C120 "1000pF" FP-C1206C-EF-MFG 147.955,109.982 r180 top
C121 ".01µF" CAPC0603X33X15NL03T05 126.492,116.586 r270 top
CC1 "100nF" FP-1210-L_3_3_0_4-W_2_5_0-MFG 145.161,106.68 r0 top
CD1 "502774-0891" MOLX-502774-0891_V 161.036,134.493 r90 top
Cg1 "470pF" FP-CC0603-DA-MFG 45.085,108.319 r270 top
Citimer1 "3.9nF" FP-CC0603-DA-MFG 41.021,125.984 r180 top
CRetry1 "1nF" FP-0603-L_1_6_0_15-W_0_81-IPC_A 40.64,119.507 r180 top
D1 "SMBJ28A" FP-SMBJ-MFG 21.463,121.158 r90 top
D2 "B5819W" MCC-SOD123_V 64.516,118.745 r180 top
D3 "SM6T7V5A" DIOM5436X265N 67.945,100.838 r0 top
D4 "B5819W" MCC-SOD123_V 66.675,107.061 r270 top
D5 "CZRU52C3V3" FP-0603-SOD-523F-MFG 77.47,108.458 r0 top
D6 "SS54B" JCET-SMB-2_M 24.638,91.948 r270 top
D7 "LTST-C190KRKT" FP-LTST-C190KRKT-MFG 76.962,104.648 r180 top
D7_1 "SMBJ28A" FP-SMBJ-MFG 59.69,60.96 r90 top (schematic designator D13)
D7_2 "SMBJ28A" FP-SMBJ-MFG 80.499,60.96 r90 top (schematic designator D13)
D7_3 "SMBJ28A" FP-SMBJ-MFG 101.146,60.96 r90 top (schematic designator D13)
D8_1 "SMBJ28A" FP-SMBJ-MFG 108.331,57.658 r0 top (schematic designator D8)
D8_2 "SMBJ28A" FP-SMBJ-MFG 118.491,57.658 r0 top (schematic designator D8)
D8_3 "SMBJ28A" FP-SMBJ-MFG 128.651,57.658 r0 top (schematic designator D8)
D8_4 "SMBJ28A" FP-SMBJ-MFG 138.811,57.658 r0 top (schematic designator D8)
D9 "SMBJ28A" FP-SMBJ-MFG 49.657,133.731 r270 top
D10 "SS54B" JCET-SMB-2_M 26.416,122.174 r270 top
D11 "CZRU52C3V3" FP-0603-SOD-523F-MFG 62.23,145.542 r90 top
D12 "SMBJ28A" FP-SMBJ-MFG 28.067,131.953 r180 top
D14 "1N4148WS" DIOD-SOD323-2-A_V 124.968,92.202 r270 top
DQ1 "SK104-TP" MCC-DO-214AB-2_V 57.658,138.684 r0 top
DQ2 "SK104-TP" MCC-DO-214AB-2_V 35.941,137.541 r0 top
FB1 "GZ1608D601TF" BEADC1608X95N 131.572,101.219 r0 top
FB2 "GZ1608D601TF" BEADC1608X95N 131.826,105.664 r0 top
IC1 "TMCS1108A2UQDR" SOIC127P600X175-8N 21.336,99.06 r0 top
IC2 "SY6280AAAC" SOT95P285X140-5N 43.307,100.076 r180 top
IC3 "SY6280AAAC" SOT95P285X140-5N 71.501,110.871 r180 top
IC4 "TPS54331DR" SOIC127P600X175-8N 43.942,89.535 r180 top
IC5 "STM32H743ZIT6" QFP50P2200X2200X160-144N 91.8,95 r45 top
IC6_1 "MPQ6610GJ-AEC1-P" SOT65P280X100-8N 108.204,64.262 r270 top (schematic designator IC6)
IC6_2 "MPQ6610GJ-AEC1-P" SOT65P280X100-8N 118.364,64.262 r270 top (schematic designator IC6)
IC6_3 "MPQ6610GJ-AEC1-P" SOT65P280X100-8N 128.524,64.262 r270 top (schematic designator IC6)
IC6_4 "MPQ6610GJ-AEC1-P" SOT65P280X100-8N 138.684,64.262 r270 top (schematic designator IC6)
IC7 "TPS259830ONRGER" TPS259830ONRGER 47.117,121.539 r270 top
J1 "61800925023" 61800925023 157.33,66.433 r90 top
J2 "XT30PW-M" XT30PWM 38.735,149.733 r0 top
J3 "XT30PW-M" XT30PWM 52.324,149.733 r0 top
J4 "XT30PW-F" XT30PWF 36.116,68.627 r180 top
J5 "M12 Connector" FP-1424177-MFG 160.481,93.218 r180 top
J6 "M12 Connector" FP-1424177-MFG 160.525,115.703 r180 top
JADC1 "61802525023" 61802525023 84.069,150 r0 top
JADC2 "61802525023" 61802525023 137.566,150 r0 top
JALT "PPTC071LFBN-RC" RHDR7W80P0X254_1X7_1828X254X870P 132.461,81.28 r0 top
JIMU "00472" 00472 70.612,135.89 r270 top
JPyro1 "61802525023" 61802525023 66.5,44.5 r0 top
JValve1 "61802525023" 61802525023 119.9,44.5 r0 top
L1 "22u, 94mOhm" INDPM8682X400N 32.639,88.706 r90 top
LED1 "QBLP595-IG" QTB-QBLP595_V 60.706,143.129 r270 top
LED2 "QBLP595-IB" QTB-QBLP595_V 31.75,142.748 r90 top
LED3 "QBLP595-Y" QTB-QBLP595_V 118.999,87.63 r270 top
LED4 "QBLP595-IG" QTB-QBLP595_V 117.729,87.63 r270 top
LED5 "QBLP595-Y" QTB-QBLP595_V 122.809,91.567 r270 top
LED6 "QBLP595-IG" QTB-QBLP595_V 121.539,91.567 r270 top
P1 "620302124022" 620302124022 136.017,140.462 r180 top
P2 "620302124022" 620302124022 95.631,120.015 r180 top
P3 "FTSH-105-01-F-DV-K" SMTC-FTSH-105-01-L-DV-K_V 82.804,110.871 r225 top
QD1 "Si7469DP" FP-S17-0173-SINGLE-MFG 58.036,132.08 r180 top
QD2 "Si7469DP" FP-S17-0173-SINGLE-MFG 58.036,122.555 r180 top
QD3 "Si7469DP" FP-S17-0173-SINGLE-MFG 36.446,129.921 r180 top
QFuse1 "CSD18511Q5AT" FP-DQJ0008A-MFG 32.597,114.935 r0 top
R1 "22K" FP-CRCW0603-e3-IPC_B 67.437,78.994 r270 top
R2 "22K" FP-CRCW0603-e3-IPC_B 53.467,96.393 r180 top
R3 "200k" FP-RC0603-0_55-IPC_B 67.437,76.073 r270 top
R4 "10KR2F" RESC0402(1005)_L 56.769,95.758 r180 top value=10k
R5 "10KR2F" RESC0402(1005)_L 66.675,125.095 r180 top value=10k
R6 "3.4k" RESC1609X50X30LL10T20 49.657,103.505 r0 top
R7 "3.4k" RESC1609X50X30LL10T20 74.168,113.792 r90 top
R8 "Resistor 100k +/-1% 0603 100 mW" RESC1608X55X25ML10T15 51.054,89.535 r270 top value=100k
R9 "10k" FP-CRCW0805-e3-IPC_A 19.812,89.119 r270 top
R10 "20k" FP-CRCW0402-e3-IPC_B 45.72,95.758 r270 top
R11 "10k" FP-CRCW0805-e3-IPC_A 49.784,93.218 r270 top
R12 "1.96k" FP-CRCW0402-e3-MFG 16.002,92.329 r270 top
R13 "Resistor 20R +/-1% 0603 100 mW" RESC1609X50X30ML08T20 74.676,105.41 r270 top value=120
R15 "10KR2F" RESC0402(1005)_L 83.439,105.918 r225 top value=10k
R16 "0" FP-CRCW1206-e3-MFG 123.063,74.549 r180 top
R18_1 "5k" RESC1608X55N 107.569,68.326 r270 top (schematic designator R18)
R18_2 "5k" RESC1608X55N 117.729,68.326 r270 top (schematic designator R18)
R18_3 "5k" RESC1608X55N 127.889,68.326 r270 top (schematic designator R18)
R18_4 "5k" RESC1608X55N 138.049,68.326 r270 top (schematic designator R18)
R19 "Resistor 120R +/-5 % 0603 0.1 W" RESC0603(1608)_L 94.488,132.715 r0 top value=100
R20 "Resistor 120R +/-5 % 0603 0.1 W" RESC0603(1608)_L 94.488,131.572 r0 top value=100
R21 "Resistor 120R +/-5 % 0603 0.1 W" RESC0603(1608)_L 92.837,127.635 r0 top value=100
R22 "Resistor 120R +/-5 % 0603 0.1 W" RESC0603(1608)_L 92.837,126.492 r0 top value=100
R23 "Resistor 120R +/-5 % 0603 0.1 W" RESC0603(1608)_L 127.254,126.238 r180 top value=100
R24 "Resistor 120R +/-5 % 0603 0.1 W" RESC0603(1608)_L 102.489,132.715 r180 top value="10 M"
R25 "Resistor 120R +/-5 % 0603 0.1 W" RESC0603(1608)_L 100.838,127.762 r180 top value="10 M"
R26 "Resistor 120R +/-5 % 0603 0.1 W" RESC0603(1608)_L 119.38,126.238 r0 top value="10 M"
R27 "Resistor 120R +/-5 % 0603 0.1 W" RESC0603(1608)_L 117.348,130.556 r0 top value="10 M"
R28 "Resistor 120R +/-5 % 0603 0.1 W" RESC0603(1608)_L 115.189,135.128 r0 top value="10 M"
R29 "Resistor 120R +/-5 % 0603 0.1 W" RESC0603(1608)_L 113.254,140.335 r0 top value="10 M"
R30 "Resistor 120R +/-5 % 0603 0.1 W" RESC0603(1608)_L 108.966,141.986 r180 top value="10 M"
R31 "Resistor 120R +/-5 % 0603 0.1 W" RESC0603(1608)_L 106.68,137.922 r180 top value="10 M"
R32 "Resistor 120R +/-5 % 0603 0.1 W" RESC0603(1608)_L 127.254,127.762 r180 top value=100
R33 "Resistor 120R +/-5 % 0603 0.1 W" RESC0603(1608)_L 125.476,130.81 r180 top value=100
R34 "Resistor 120R +/-5 % 0603 0.1 W" RESC0603(1608)_L 125.476,132.207 r180 top value=100
R35 "Resistor 120R +/-5 % 0603 0.1 W" RESC0603(1608)_L 123.317,135.509 r180 top value=100
R36 "Resistor 120R +/-5 % 0603 0.1 W" RESC0603(1608)_L 123.317,136.779 r180 top value=100
R37 "Resistor 120R +/-5 % 0603 0.1 W" RESC0603(1608)_L 121.382,140.462 r180 top value=100
R38 "Resistor 120R +/-5 % 0603 0.1 W" RESC0603(1608)_L 102.489,131.445 r180 top value="10 M"
R39 "Resistor 120R +/-5 % 0603 0.1 W" RESC0603(1608)_L 100.838,126.619 r180 top value="10 M"
R40 "Resistor 120R +/-5 % 0603 0.1 W" RESC0603(1608)_L 119.38,127.762 r0 top value="10 M"
R41 "Resistor 120R +/-5 % 0603 0.1 W" RESC0603(1608)_L 117.348,132.207 r0 top value="10 M"
R42 "Resistor 120R +/-5 % 0603 0.1 W" RESC0603(1608)_L 115.189,136.779 r0 top value="10 M"
R43 "Resistor 120R +/-5 % 0603 0.1 W" RESC0603(1608)_L 113.254,141.605 r0 top value="10 M"
R44 "Resistor 120R +/-5 % 0603 0.1 W" RESC0603(1608)_L 108.966,140.716 r180 top value="10 M"
R45 "Resistor 120R +/-5 % 0603 0.1 W" RESC0603(1608)_L 106.745,136.398 r180 top value="10 M"
R46 "Resistor 120R +/-5 % 0603 0.1 W" RESC0603(1608)_L 121.382,141.732 r180 top value=100
R47 "Resistor 120R +/-5 % 0603 0.1 W" RESC0603(1608)_L 100.838,142.113 r0 top value=100
R48 "Resistor 120R +/-5 % 0603 0.1 W" RESC0603(1608)_L 100.838,140.843 r0 top value=100
R49 "Resistor 120R +/-5 % 0603 0.1 W" RESC0603(1608)_L 98.298,137.795 r0 top value=100
R50 "Resistor 120R +/-5 % 0603 0.1 W" RESC0603(1608)_L 98.298,136.271 r0 top value=100
R51 "200k" FP-RC0603-0_55-IPC_B 60.706,145.415 r270 top
R52 "200k" FP-RC0603-0_55-IPC_B 53.086,133.477 r270 top
R53 "Resistor 1k +/-1% 0603 100 mW" RESC1608X55X25ML10T15 51.562,139.573 r270 top value=1k
R54 "220kΩ" RESC1608X55X30ML20T20 46.482,127.762 r0 top
R55 "10k" RESC1609X55X30LL15T15 62.23,143.002 r270 top
R56 "22kΩ" RESC1609X50X30ML10T20 50.038,127.762 r180 top
R57 "Resistor 1k +/-1% 0603 100 mW" RESC1608X55X25ML10T15 43.307,139.573 r270 top value=1k
R58 "Resistor 10k +/-1% 0603 100 mW" RESC1608X55X25ML10T15 63.754,143.383 r90 top value=5.6k
R59 "200k" FP-RC0603-0_55-IPC_B 41.529,139.319 r270 top
R60 "10k" RESC1609X55X30LL15T15 50.927,125.857 r180 top
R61 "200k" FP-RC0603-0_55-IPC_B 28.321,140.589 r0 top
R62_1 "Resistor 100k +/-1% 0603 100 mW" RESC1608X55X25ML10T15 42.799,66.04 r90 top value=100k (schematic designator R62)
R62_2 "Resistor 100k +/-1% 0603 100 mW" RESC1608X55X25ML10T15 64.008,66.04 r90 top value=100k (schematic designator R62)
R62_3 "Resistor 100k +/-1% 0603 100 mW" RESC1608X55X25ML10T15 84.655,66.04 r90 top value=100k (schematic designator R62)
R63_1 "Resistor 100k +/-1% 0603 100 mW" RESC1608X55X25ML10T15 41.275,66.04 r270 top value=100k (schematic designator R63)
R63_2 "Resistor 100k +/-1% 0603 100 mW" RESC1608X55X25ML10T15 62.484,66.04 r270 top value=100k (schematic designator R63)
R63_3 "Resistor 100k +/-1% 0603 100 mW" RESC1608X55X25ML10T15 83.131,66.04 r270 top value=100k (schematic designator R63)
R64_1 "Resistor 120R +/-5 % 0603 0.1 W" RESC0603(1608)_L 54.864,72.898 r180 top value=120 (schematic designator R64)
R64_2 "Resistor 120R +/-5 % 0603 0.1 W" RESC0603(1608)_L 76.073,72.898 r180 top value=120 (schematic designator R64)
R64_3 "Resistor 120R +/-5 % 0603 0.1 W" RESC0603(1608)_L 96.52,72.898 r180 top value=120 (schematic designator R64)
R65_1 "Resistor 120R +/-5 % 0603 0.1 W" RESC0603(1608)_L 52.959,73.279 r270 top value=120 (schematic designator R65)
R65_2 "Resistor 120R +/-5 % 0603 0.1 W" RESC0603(1608)_L 74.168,73.279 r270 top value=120 (schematic designator R65)
R65_3 "Resistor 120R +/-5 % 0603 0.1 W" RESC0603(1608)_L 94.615,73.279 r270 top value=120 (schematic designator R65)
R66_1 "470R5J" RESC0805(2012)_L 50.8,73.152 r180 top value=470 (schematic designator R66)
R66_2 "470R5J" RESC0805(2012)_L 72.009,73.152 r180 top value=470 (schematic designator R66)
R66_3 "470R5J" RESC0805(2012)_L 92.456,73.152 r180 top value=470 (schematic designator R66)
R67_1 "2k" RESC1609X50X30ML10T20 49.53,74.93 r180 top (schematic designator R67)
R67_2 "2k" RESC1609X50X30ML10T20 70.739,74.93 r180 top (schematic designator R67)
R67_3 "2k" RESC1609X50X30ML10T20 91.186,74.93 r180 top (schematic designator R67)
R68 "Resistor 22R +/-1% 0603 100 mW" RESC1609X50X30ML08T20 132.08,131.318 r270 top value=33
R69 "Resistor 22R +/-1% 0603 100 mW" RESC1609X50X30ML08T20 139.192,131.699 r270 top value=33
R70 "Resistor 20R +/-1% 0603 100 mW" RESC1609X50X30ML08T20 136.017,134.493 r0 top value=120
R72 "10kΩ" FP-AC0603-MFG 126.492,92.202 r90 top
R73 "4.7kΩ" RESC2013X60X40ML20T25 114.554,100.584 r180 top
R74 "Resistor 1k +/-1% 0603 100 mW" RESC1608X55X25ML10T15 125.603,97.155 r0 top value=1k
R75 "11.8kΩ" RESC2013X70X40NL20T20 138.938,106.553 r90 top
R76 "49.9Ω" FP-RT0603-MFG 133.096,98.425 r270 top
R77 "49.9Ω" FP-RT0603-MFG 129.667,98.425 r270 top
R78 "49.9Ω" FP-RT0603-MFG 128.143,98.425 r270 top
R79 "49.9Ω" FP-RT0603-MFG 131.318,98.425 r270 top
R80 "4.7kΩ" RESC2013X60X40ML20T25 115.57,97.282 r270 top
R81 "10kΩ" FP-AC0603-MFG 113.665,108.077 r180 top
R82 "10kΩ" FP-AC0603-MFG 122.301,111.379 r270 top
R83 "10kΩ" FP-AC0603-MFG 124.206,110.998 r270 top
R84 "75Ω" FP-RT0603-MFG 148.59,86.741 r0 top
R85 "10kΩ" FP-AC0603-MFG 113.665,104.775 r0 top
R86 "75Ω" FP-RT0603-MFG 148.717,93.091 r0 top
R87 "75Ω" FP-RT0603-MFG 147.955,89.789 r90 top
R88 "75Ω" FP-RT0603-MFG 149.606,89.789 r90 top
R89 "49.9Ω" FP-RT0603-MFG 130.683,109.474 r90 top
R90 "49.9Ω" FP-RT0603-MFG 132.715,109.474 r90 top
R91 "49.9Ω" FP-RT0603-MFG 127.381,109.474 r90 top
R92 "49.9Ω" FP-RT0603-MFG 129.032,109.474 r90 top
R93 "10kΩ" FP-AC0603-MFG 113.665,106.426 r0 top
R94 "10kΩ" FP-AC0603-MFG 118.618,93.472 r90 top
R95 "Resistor 1k +/-1% 0603 100 mW" RESC1608X55X25ML10T15 122.047,94.361 r270 top value=1k
R96 "10kΩ" FP-AC0603-MFG 120.269,93.472 r90 top
R97 "220Ω" FP-RT0603-MFG 120.904,85.725 r180 top
R98 "75Ω" FP-RT0603-MFG 149.225,115.443 r0 top
R99 "75Ω" FP-RT0603-MFG 148.971,121.793 r0 top
R100 "75Ω" FP-RT0603-MFG 149.86,118.618 r90 top
R101 "220Ω" FP-RT0603-MFG 120.904,84.201 r180 top
R102 "75Ω" FP-RT0603-MFG 148.209,118.618 r90 top
R103 "220Ω" FP-RT0603-MFG 123.19,89.027 r90 top
R104 "220Ω" FP-RT0603-MFG 121.539,89.027 r90 top
RC1 "Resistor 0R +/- 1% 0805 125 mW" RESC2013X50X35ML15T15 140.97,106.553 r90 top value=0
RG1 "2Ohm" FP-CRCW2512-e3-IPC_C 45.593,115.57 r180 top
Rhold1 "Resistor 2K +/-5 % 0402 63 mW" RESC0402(1005)_L 147.701,129.979 r90 top value=2k
RIlimit1 "Resistor 120R +/-5 % 0603 0.1 W" RESC0603(1608)_L 40.64,124.333 r0 top value=120
RIMON1 "10k" FP-CRCW0805-e3-IPC_A 40.513,122.174 r0 top
Rpg1 "22kΩ" RESC1609X50X30ML10T20 52.578,118.491 r180 top
Rpl1 "10KR2F" RESC0402(1005)_L 39.243,100.203 r270 top value=10k
Rpl2 "10KR2F" RESC0402(1005)_L 68.58,111.379 r270 top value=10k
RS1_1 "47k" FP-CRCW0603-e3-IPC_B 42.672,63.119 r90 top (schematic designator RS1)
RS1_2 "47k" FP-CRCW0603-e3-IPC_B 63.881,63.119 r90 top (schematic designator RS1)
RS1_3 "47k" FP-CRCW0603-e3-IPC_B 84.528,63.119 r90 top (schematic designator RS1)
RS2_1 "10KR2F" RESC0402(1005)_L 41.275,68.453 r90 top value=10k (schematic designator RS2)
RS2_2 "10KR2F" RESC0402(1005)_L 62.484,68.453 r90 top value=10k (schematic designator RS2)
RS2_3 "10KR2F" RESC0402(1005)_L 83.131,68.453 r90 top value=10k (schematic designator RS2)
RT1 "47K" FP-NCP18-0_15-IPC_A 67.183,121.285 r0 top
T1 "HX1188NL" FP-HX1188NL-MFG 141.732,90.805 r0 top
T2 "HX1188NL" FP-HX1188NL-MFG 142.113,118.618 r0 top
TP1 "TPAD6R" TP06R#1 13.335,119.38 r90 top
TP2 "TPAD6R" TP06R#1 13.716,98.298 r90 top
TP3 "TPAD6R" TP06R#1 64.262,102.362 r90 top
TP4 "TPAD6R" TP06R#1 52.705,99.314 r90 top
TP5 "TPAD6R" TP06R#1 76.073,107.188 r90 top
TP6 "TPAD6R" TP06R#1 59.182,84.582 r90 top
TP7 "TPAD6R" TP06R#1 38.354,93.98 r90 top
TP8 "TPAD6R" TP06R#1 68.453,107.061 r90 top
TP15_1 "TPAD6R" TP06R#1 111.506,50.292 r90 top (schematic designator TP15)
TP15_2 "TPAD6R" TP06R#1 115.316,53.594 r90 top (schematic designator TP15)
TP15_3 "TPAD6R" TP06R#1 125.603,53.594 r90 top (schematic designator TP15)
TP15_4 "TPAD6R" TP06R#1 135.89,53.467 r90 top (schematic designator TP15)
TP16 "TPAD6R" TP06R#1 100.711,133.731 r90 top
TP17 "TPAD6R" TP06R#1 100.711,130.429 r90 top
TP18 "TPAD6R" TP06R#1 107.95,132.969 r90 top
TP19 "TPAD6R" TP06R#1 113.792,125.349 r90 top
TP20 "TPAD6R" TP06R#1 106.934,125.73 r90 top
TP21 "TPAD6R" TP06R#1 104.775,139.065 r90 top
TP22 "TPAD6R" TP06R#2 104.902,135.382 r90 top
TP23 "TPAD6R" TP06R#1 59.375,142.773 r90 top
TP24 "TPAD6R" TP06R#1 39.851,140.196 r90 top
TP25 "TPAD6R" TP06R#1 28.194,68.707 r90 top
TP26 "TPAD6R" TP06R#1 22.86,139.7 r90 top
TP27_1 "TPAD6R" TP06R#1 196.088,33.909 r90 top (schematic designator TP27)
TP27_2 "TPAD6R" TP06R#1 196.596,39.751 r90 top (schematic designator TP27)
TP27_3 "TPAD6R" TP06R#1 196.596,45.593 r90 top (schematic designator TP27)
TP28_1 "TPAD6R" TP06R#1 42.098,56.63 r90 top (schematic designator TP28)
TP28_2 "TPAD6R" TP06R#1 63.881,55.499 r90 top (schematic designator TP28)
TP28_3 "TPAD6R" TP06R#1 84.709,53.086 r90 top (schematic designator TP28)
TP29 "TPAD6R" TP06R#1 129.794,103.886 r90 top
TP30 "TPAD6R" TP06R#1 123.825,96.901 r90 top
TP31 "TPAD6R" TP06R#1 125.603,110.109 r90 top
TP32 "TPAD6R" TP06R#1 146.685,111.633 r90 top
TPCS1 "TPAD6R" TP06R#3 115.062,117.983 r90 top
TPMISO1 "TPAD6R" TP06R#4 109.347,121.158 r90 top
TPMOSI1 "TPAD6R" TP06R#5 110.49,120.269 r90 top
TPSCLK1 "TPAD6R" TP06R#6 108.204,120.269 r90 top
U1 "LM358DR2G" ONSC-SOIC-8-751-07_V 62.484,77.597 r180 top
U2 "LM358DR2G" ONSC-SOIC-8-751-07_V 63.119,93.472 r0 top
U3 "LM1084IS-3.3RG" KTT0003B_N 57.531,109.22 r90 top
U4 "BMP388" FP-3966-MFG 125.857,70.485 r180 top
U5 "SST25VF016B-50-4C-S2AF" MCHP-SOIC-S2A8_M 144.263,136.671 r270 top
U6 "AD7173-8BCPZ" FP-CP-40-14-IPC_C 110.916,129.171 r0 top
U7_1 "IFX007TAUMA1" FP-PG-TO263-7-MFG#1 51.181,61.722 r180 top (schematic designator U7)
U7_2 "IFX007TAUMA1" FP-PG-TO263-7-MFG#1 72.39,61.722 r180 top (schematic designator U7)
U7_3 "IFX007TAUMA1" FP-PG-TO263-7-MFG#2 92.837,61.722 r180 top (schematic designator U7)
U8 "TCAN332DCNR" FP-DCN0008A-IPC_A 136.073,131.706 r90 top
U9 "KSZ8863RLLI" FP-LQFP7x7-48LD-PL-1-IPC_B 122.555,103.505 r180 top
XF1 "696105003002" 696105003002 30.727,107.4 r180 top

## Footprints (in the part's own frame and the unit in brackets; to place one, negate y for a bottom-side part, rotate by r counter-clockwise, add the part's x,y. Pads: shape width x height; smd on the part's side, far side on the other; paste and mask are expansions set on the pad)
00472 [mm]
  round 1.665 hole 1.11: 1(0,0) 2(2.54,0) 3(5.08,0) 4(7.62,0) 5(10.16,0) 6(12.7,0) 7(2.54,17.78) 8(5.08,17.78) 9(7.62,17.78) 10(10.16,17.78)
  round 2.54 hole 2.54: MH1(-4.445,1.27) MH2(17.145,1.27) MH3(-4.445,16.51) MH4(17.145,16.51)
  silkscreen extent -6.99,-1.27 19.68,19.05, body extent -6.99,-1.27 19.68,19.05, height 2.1
61800925023 [mm] "9 pins, straight"
  rect 1.5x1.5 hole 1: 1(-5.54,1.42)
  round 1.5 hole 1: 2(-2.77,1.42) 3(0,1.42) 4(2.77,1.42) 5(5.54,1.42) 6(-4.155,-1.42) 7(-1.385,-1.42) 8(1.385,-1.42) 9(4.155,-1.42)
  round 4.95 hole 3.3: M1(-12.495,0) M2(12.495,0)
  silkscreen extent -15.41,-6.25 15.41,6.25, body extent -15.41,-6.3 15.4,6.2, height 12.97
61802525023 [mm] "25 pins, straight"
  rect 1.5x1.5 hole 1: 1(-16.62,1.42)
  round 1.5 hole 1: 2(-13.85,1.42) 3(-11.08,1.42) 4(-8.31,1.42) 5(-5.54,1.42) 6(-2.77,1.42) 7(0,1.42) 8(2.77,1.42) 9(5.54,1.42) 10(8.31,1.42) 11(11.08,1.42) 12(13.85,1.42) 13(16.62,1.42) 14(-15.235,-1.42) 15(-12.465,-1.42) 16(-9.695,-1.42) 17(-6.925,-1.42) 18(-4.155,-1.42) 19(-1.385,-1.42) 20(1.385,-1.42) 21(4.155,-1.42) 22(6.925,-1.42) 23(9.695,-1.42) 24(12.465,-1.42) 25(15.235,-1.42)
  round 4.95 hole 3.3: M1(-23.52,0) M2(23.52,0)
  silkscreen extent -26.52,-6.25 26.52,6.25, body extent -26.52,-6.25 26.52,6.25, height 12.97
620302124022 [mm] "2.00mm SMT Male Vertical Shrouded Header, 2p"
  rect 1x5.5 smd: 1(1,2.25) 2(-1,2.25)
  rect 1.6x3 smd: MP1(-3.4,0) MP2(3.4,0)
  silkscreen extent -4.15,-2.6 4.15,3.32, body extent -4,-2.5 4,4.51, height 6.77
696105003002 [mm] "FUSEHOLDER BLOCKS - PCB - CLIP COVER - THT"
  round 2.25 hole 1.5: 1(-7.5,0) 2(7.5,0)
  round 2.6 hole 2.6 unplated: MH1(0,0)
  silkscreen extent -12.2,-4.7 12.2,4.7, body extent -12.2,-4.7 12.2,4.7, height 11.55
ABRA-ABM3B-4_V [mm] "SMD, 4-Leads, Body 5x3.2mm"
  rect 1.8x1.2 smd: 1(-2,-1.2) 2(2,-1.2) 3(2,1.2) 4(-2,1.2)
  silkscreen extent -3.57,-1.6 2.5,1.6, body extent -2.5,-1.59 2.5,1.59, height 1.13
BEADC1608X95N [mm]
  rect 0.9x1 smd: 1(-0.8,0) 2(0.8,0)
  silkscreen extent 0,-0.3 0,0.3, body extent -0.8,-0.4 0.8,0.4, height 0.95
CAPC0402(1005)60_L [mm] "Chip Capacitor, Body 1.0x0.5mm, Height 0.6mm, IPC High Density"
  rrect25% 0.5x0.55 smd: 1(-0.45,0) 2(0.45,0)
  silkscreen extent 0,-0.2 0,0.2, body extent -0.5,-0.25 0.5,0.25, height 0.6
CAPC0603(1608)100_L [mm] "Chip Capacitor, Body 1.6x0.8mm, Height 1.0mm, IPC High Density"
  rrect25% 0.66x0.76 smd: 1(-0.7,0) 2(0.7,0)
  silkscreen extent 0,-0.3 0,0.3, body extent -0.8,-0.4 0.8,0.4, height 0.95
CAPC0603X33X15NL03T05 [mm] "Chip Capacitor, 2-Leads, Body 0.60x0.30mm, IPC Medium Density"
  rect 0.46x0.42 smd: 1(-0.33,0) 2(0.33,0)
  body extent -0.31,-0.17 0.32,0.16, height 0.33
CAPC0805(2012)145_L [mm] "Chip Capacitor, Body 2.0x1.2mm, Height 1.45mm, IPC High Density"
  rrect25% 0.76x1.3 smd: 1(-0.9,0) 2(0.89,0)
  silkscreen extent -0.3,-0.55 0.3,0.55, body extent -1,-0.6 1,0.6, height 1.45
CAPC1005X55X25NL05T10 [mm] "Chip Capacitor, 2-Leads, Body 1.00x0.50mm, IPC Medium Density"
  rect 0.66x0.62 smd: 1(-0.44,0) 2(0.44,0)
  body extent -0.53,-0.28 0.53,0.27, height 0.55
CAPC1005X56X25LL10T15 [mm] "Chip Capacitor, 2-Leads, Body 1.10x0.60mm, IPC High Density"
  rect 0.58x0.54 smd: 1(-0.39,0) 2(0.39,0)
  body extent -0.55,-0.3 0.55,0.3, height 0.56
CAPC1206(3216)190_L [mm] "Chip Capacitor, Body 3.2x1.6mm, Height 1.9mm, IPC High Density"
  rect 0.95x1.7 smd: 1(-1.4,0) 2(1.4,0)
  silkscreen extent -0.55,-0.75 0.55,0.75, body extent -1.7,-0.9 1.7,0.9, height 1.9
CAPC1210(3225)280_L [mm] "Chip Capacitor, Body 3.2x2.5mm, Height 2.8mm, IPC High Density"
  rect 0.95x2.6 smd: 1(-1.4,0) 2(1.4,0)
  silkscreen extent -0.55,-1.2 0.55,1.2, body extent -1.7,-1.4 1.7,1.4, height 2.8
CAPC1608X90N [mm]
  rect 0.83x0.94 smd: 1(-0.66,0) 2(0.66,0)
  body extent -0.8,-0.4 0.8,0.4, height 0.9
CAPC1608X90X40LL10T20 [mm] "Chip Capacitor, 2-Leads, Body 1.70x0.90mm, IPC High Density"
  rect 0.85x0.85 smd: 1(-0.575,0) 2(0.575,0)
  body extent -0.85,-0.45 0.85,0.45, height 0.9
CAPC1608X90X40NL10T20 [mm] "Chip Capacitor, 2-Leads, Body 1.70x0.90mm, IPC Medium Density"
  rect 0.95x0.95 smd: 1(-0.625,0) 2(0.625,0)
  body extent -0.85,-0.45 0.85,0.45, height 0.9
CAPC1608X94X35NL15T15 [mm] "Chip Capacitor, 2-Leads, Body 1.75x0.96mm, IPC Medium Density"
  rect 1.05x1 smd: 1(-0.75,0) 2(0.75,0)
  body extent -0.87,-0.48 0.87,0.48, height 0.94
CAPC2013X100X50NL20T25 [mm] "Chip Capacitor, 2-Leads, Body 2.00x1.25mm, IPC Medium Density"
  rect 1.3x1.45 smd: 1(-0.8,0) 2(0.8,0)
  body extent -1.1,-0.72 1.1,0.72, height 1
CAPC3216X180N [mm]
  rect 1.05x1.82 smd: 1(-1.39,0) 2(1.39,0)
  silkscreen extent 0,-0.7 0,0.7, body extent -1.6,-0.8 1.6,0.8, height 1.8
DIOD-SOD323-2-A_V [mm] "SOD-323, 2-Leads, Body 1.7x1.3mm, Lead Span 2.5mm"
  rect 0.59x0.45 smd: 1(-1.055,0) 2(1.055,0)
  silkscreen extent -0.85,-0.65 1.85,0.65, body extent -1.24,-0.7 1.24,0.7, height 1.2
DIOM5436X265N [mm]
  rect 2.2x2.15 smd: 1(-2.2,0) 2(2.2,0)
  silkscreen extent -3.27,-1.81 2.68,1.81, body extent -2.68,-1.86 2.68,1.86, height 2.33
FP-0603-L_1_6_0_15-W_0_81-IPC_A [mil]
  rect 47.5x42.06 smd paste+0 mask+0: 1(-32.51,0) 2(32.51,0)
  silkscreen extent -56,-37 56,37, body extent -76,-41 76,41, height 10
FP-0603-SOD-523F-MFG [mm]
  rect 0.6x0.8 smd paste+0 mask+0: 1(-0.85,0) 2(0.85,0)
  silkscreen extent -1.85,-0.5 0.18,0.5, body extent -1.25,-0.6 1.25,0.6, height 0.25
FP-1210-L_3_3_0_4-W_2_5_0-MFG [mm]
  rect 1x2.5 smd paste+0 mask+0: 1(-1.5,0) 2(1.5,0)
  silkscreen extent -0.63,-1.4 0.63,1.4, body extent -2.1,-1.45 2.1,1.45, height 0.25
FP-3966-MFG [mm]
  rect 1.78x1.78 hole 1 paste-2539.97 mask+0: 1(-8.89,-6.35)
  round 1.78 hole 1 paste-2539.97 mask+0: 2(-6.35,-6.35) 3(-3.81,-6.35) 4(-1.27,-6.35) 5(1.27,-6.35) 6(3.81,-6.35) 7(6.35,-6.35) 8(8.89,-6.35)
  silkscreen extent -13.42,-8.89 12.7,8.89, body extent -12.8,-8.99 12.8,8.99, height 0.25
FP-1424177-MFG [mm]
  rect 1.35x1.35 hole 0.85 paste-2539.97 mask+0: 1(-1.4,-2.8)
  round 1.35 hole 0.85 paste-2539.97 mask+0: 2(-2.8,-1.4) 3(-2.8,1.4) 4(-1.4,2.8) 5(1.4,2.8) 6(2.8,1.4) 7(2.8,-1.4) 8(1.4,-2.8)
  round 1.9 hole 1.25 paste-2539.97 mask+0: 9(-5,0) 10(5,0) 11(0,-5)
  silkscreen extent -10.23,-10.97 9.5,10.97, body extent -9.6,-11.07 9.6,11.07, height 0.25
FP-AC0603-MFG [mm]
  rect 0.9x0.8 smd paste+0 mask+0: 1(-0.85,0) 2(0.85,0)
  silkscreen extent -0.85,-0.82 0.85,0.82, body extent -1.4,-0.55 1.4,0.55, height 0.25
FP-C0603C-CF-MFG [mm]
  rect 0.75x0.9 smd paste+0 mask+0: 1(-0.6,0) 2(0.6,0)
  silkscreen extent -0.87,-0.85 0.88,0.85, body extent -1.2,-0.6 1.2,0.6, height 0.25
FP-C0805C-DN-MFG [mm]
  rect 0.95x1.35 smd paste+0 mask+0: 1(-0.75,0) 2(0.75,0)
  silkscreen extent -1.1,-1.07 1.1,1.07, body extent -1.4,-0.85 1.4,0.85, height 0.25
FP-C1206C-EF-MFG [mm]
  rect 0.95x1.7 smd paste+0 mask+0: 1(-1.4,0) 2(1.4,0)
  silkscreen extent -0.55,-0.9 0.55,0.9, body extent -2,-1 2,1, height 0.25
FP-C1210C476M4PACTU-MFG [mm]
  rect 1.2x2.7 smd paste+0 mask+0: 1(-1.3,0) 2(1.3,0)
  silkscreen extent -0.33,-1.4 0.33,1.4, body extent -2,-1.5 2,1.5, height 0.25
FP-CC0402-MFG [mm]
  rect 0.5x0.5 smd paste+0 mask+0: 1(-0.5,0) 2(0.5,0)
  silkscreen extent -0.53,-0.68 0.53,0.67, body extent -0.87,-0.47 0.87,0.47, height 0.25
FP-CC0603-DA-MFG [mm]
  rect 0.8x0.9 smd paste+0 mask+0: 1(-0.75,0) 2(0.75,0)
  silkscreen extent -0.85,-0.85 0.85,0.85, body extent -1.35,-0.75 1.35,0.75, height 0.25
FP-CGA3E-0_3-0_1-IPC_A [mm]
  rect 0.956x1.206 smd paste+0 mask+0: 1(-1.025,0) 2(1.025,0)
  silkscreen extent -0.25,-0.6 0.25,0.6, body extent -2,-1.1 2,1.1, height 0.25
FP-CL21-IPC_C [mm]
  rect 1.055x1.356 smd paste+0 mask+0: 1(-0.726,0) 2(0.726,0)
  silkscreen extent -1.25,-1.12 1.25,1.12, body extent -1.35,-0.82 1.35,0.82, height 0.25
FP-CP-40-14-IPC_C [mm]
  rect 0.761x0.239 smd paste+0 mask+0: 1(-2.876,2.25)
  rrect100% 0.761x0.239 smd paste+0 mask+0: 2(-2.876,1.75) 3(-2.876,1.25) 4(-2.876,0.75) 5(-2.876,0.25) 6(-2.876,-0.25) 7(-2.876,-0.75) 8(-2.876,-1.25) 9(-2.876,-1.75) 10(-2.876,-2.25) 21(2.876,-2.25) 22(2.876,-1.75) 23(2.876,-1.25) 24(2.876,-0.75) 25(2.876,-0.25) 26(2.876,0.25) 27(2.876,0.75) 28(2.876,1.25) 29(2.876,1.75) 30(2.876,2.25)
  rrect100% 0.239x0.761 smd paste+0 mask+0: 11(-2.25,-2.876) 12(-1.75,-2.876) 13(-1.25,-2.876) 14(-0.75,-2.876) 15(-0.25,-2.876) 16(0.25,-2.876) 17(0.75,-2.876) 18(1.25,-2.876) 19(1.75,-2.876) 20(2.25,-2.876) 31(2.25,2.876) 32(1.75,2.876) 33(1.25,2.876) 34(0.75,2.876) 35(0.25,2.876) 36(-0.25,2.876) 37(-0.75,2.876) 38(-1.25,2.876) 39(-1.75,2.876) 40(-2.25,2.876)
  rect 4.05x4.05 smd paste-1000 mask+0: 41(0,0)
  silkscreen extent -3.78,-3 3,3, body extent -3.36,-3.36 3.36,3.36, height 0.25
FP-CRCW0402-e3-IPC_B [mm]
  rect 0.568x0.572 smd paste+0 mask+0: 1(-0.452,0) 2(0.452,0)
  silkscreen extent -0.74,-0.69 0.74,0.69, body extent -0.89,-0.44 0.89,0.44, height 0.25
FP-CRCW0402-e3-MFG [mm]
  rect 0.6x0.6 smd paste+0 mask+0: 1(-0.525,0) 2(0.525,0)
  silkscreen extent -0.53,-0.7 0.53,0.7, body extent -0.92,-0.4 0.92,0.4, height 0.25
FP-CRCW0603-e3-IPC_B [mm]
  rect 0.935x0.962 smd paste+0 mask+0: 1(-0.715,0) 2(0.715,0)
  silkscreen extent -0.75,-0.95 0.75,0.9, body extent -1.43,-0.73 1.43,0.73, height 0.25
FP-CRCW0805-e3-IPC_A [mil]
  rect 47.5x59.38 smd paste+0 mask+0: 1(-41.37,0) 2(41.37,0)
  silkscreen extent -3,-25 3,25, body extent -85,-49 85,49, height 10
FP-CRCW1206-e3-MFG [mm]
  rect 1.05x1.8 smd paste+0 mask+0: 1(-1.275,0) 2(1.275,0)
  silkscreen extent -0.38,-0.87 0.38,0.87, body extent -1.9,-1 1.9,1, height 0.25
FP-CRCW2512-e3-IPC_C [mm]
  rect 1.155x3.208 smd paste+0 mask+0: 1(-2.826,0) 2(2.826,0)
  silkscreen extent -1.87,-1.58 1.87,1.58, body extent -3.5,-1.75 3.5,1.75, height 0.25
FP-DCN0008A-IPC_A [mm]
  rect 1.805x0.495 smd paste+0 mask+0: 1(-1.15,0.975)
  rrect100% 1.805x0.495 smd paste+0 mask+0: 2(-1.15,0.325) 3(-1.15,-0.325) 4(-1.15,-0.975) 5(1.15,-0.975) 6(1.15,-0.325) 7(1.15,0.325) 8(1.15,0.975)
  silkscreen extent -2.82,-1.7 1.4,1.7, body extent -2.55,-1.95 2.55,1.95, height 0.25
FP-DQJ0008A-MFG [mm]
  rect 0.75x0.675 smd paste-1000 mask+0: 1(-2.752,1.905) 2(-2.752,0.635) 3(-2.752,-0.635) 4(-2.752,-1.905)
  round 3.821 smd paste-1000 mask+0: 5-6-7-8(0.35,-0.07)
  Top Layer region: 3.127,-2.242 3.127,-1.568 2.472,-1.568 2.472,-0.972 3.127,-0.972 3.127,-0.297 2.472,-0.297 2.472,0.298 3.127,0.298 3.127,0.973 2.472,0.973 2.472,1.568 3.127,1.568 3.127,2.243 -1.823,2.242 -1.823,-2.242
  silkscreen extent -3.82,-2.63 2.9,2.63, body extent -3.23,-2.6 3.23,2.6, height 0.25
FP-GRM21B-0_1-IPC_C [mm]
  rect 0.958x1.262 smd paste+0 mask+0: 1(-0.727,0) 2(0.727,0)
  silkscreen extent -1.21,-1.07 1.21,1.07, body extent -1.31,-0.77 1.31,0.77, height 0.25
FP-GRM31-0_2-MFG [mm]
  rect 1.05x1.6 smd paste+0 mask+0: 1(-1.475,0) 2(1.475,0)
  silkscreen extent -0.58,-0.9 0.58,0.9, body extent -2.1,-1 2.1,1, height 0.25
FP-HX1188NL-MFG [mm]
  rect 1.65x0.76 smd paste+0 mask+0: 1(-4.255,4.445) 2(-4.255,3.175) 3(-4.255,1.905) 4(-4.255,0.635) 5(-4.255,-0.635) 6(-4.255,-1.905) 7(-4.255,-3.175) 8(-4.255,-4.445) 9(4.255,-4.445) 10(4.255,-3.175) 11(4.255,-1.905) 12(4.255,-0.635) 13(4.255,0.635) 14(4.255,1.905) 15(4.255,3.175) 16(4.255,4.445)
  silkscreen extent -5.77,-6.42 3.62,6.42, body extent -5.18,-6.52 5.18,6.52, height 0.25
FP-LQFP7x7-48LD-PL-1-IPC_B [mm]
  rect 1.51x0.243 smd paste+0 mask+0: 1(-4.151,2.75)
  rrect100% 1.51x0.243 smd paste+0 mask+0: 2(-4.151,2.25) 3(-4.151,1.75) 4(-4.151,1.25) 5(-4.151,0.75) 6(-4.151,0.25) 7(-4.151,-0.25) 8(-4.151,-0.75) 9(-4.151,-1.25) 10(-4.151,-1.75) 11(-4.151,-2.25) 12(-4.151,-2.75) 25(4.151,-2.75) 26(4.151,-2.25) 27(4.151,-1.75) 28(4.151,-1.25) 29(4.151,-0.75) 30(4.151,-0.25) 31(4.151,0.25) 32(4.151,0.75) 33(4.151,1.25) 34(4.151,1.75) 35(4.151,2.25) 36(4.151,2.75)
  rrect100% 0.243x1.51 smd paste+0 mask+0: 13(-2.75,-4.151) 14(-2.25,-4.151) 15(-1.75,-4.151) 16(-1.25,-4.151) 17(-0.75,-4.151) 18(-0.25,-4.151) 19(0.25,-4.151) 20(0.75,-4.151) 21(1.25,-4.151) 22(1.75,-4.151) 23(2.25,-4.151) 24(2.75,-4.151) 37(2.75,4.151) 38(2.25,4.151) 39(1.75,4.151) 40(1.25,4.151) 41(0.75,4.151) 42(0.25,4.151) 43(-0.25,4.151) 44(-0.75,4.151) 45(-1.25,4.151) 46(-1.75,4.151) 47(-2.25,4.151) 48(-2.75,4.151)
  silkscreen extent -4.28,-2.75 2.75,3.58, body extent -5.16,-5.16 5.16,5.16, height 0.25
FP-LTST-C190KRKT-MFG [mm]
  rect 0.8x0.8 smd paste+0 mask+0: 1(-0.75,0) 2(0.75,0)
  silkscreen extent -1.86,-0.82 0.82,0.82, body extent -1.25,-0.55 1.25,0.55, height 0.25
FP-NCP18-0_15-IPC_A [mm]
  rect 1.306x1.058 smd paste+0 mask+0: 1(-0.776,0) 2(0.776,0)
  silkscreen extent -1.43,-0.93 1.43,0.93, body extent -1.93,-1.03 1.93,1.03, height 0.25
FP-PG-TO263-7-MFG#1 [mm]
  rect 0.8x4.6 smd paste+0 mask+0: 1(-3.81,-7.65) 2(-2.54,-7.65) 3(-1.27,-7.65) 4(0,-7.65) 5(1.27,-7.65) 6(2.54,-7.65) 7(3.81,-7.65)
  rect 10.8x9.4 smd paste+0 mask+0: 8(0,1.5)
  silkscreen extent -5.23,-9.8 5.1,-3.57, body extent -5.5,-10.05 5.5,6.3, height 0.25
FP-PG-TO263-7-MFG#2 [mm]
  rect 0.8x4.6 smd paste+0 mask+0: 1(-3.81,-7.65) 2(-2.54,-7.65) 3(-1.27,-7.65) 4(0,-7.65) 5(1.27,-7.65) 6(2.54,-7.65) 7(3.81,-7.65)
  rect 10.8x9.4 smd paste+0 mask+0: 8(-0.2,1.5)
  silkscreen extent -5.23,-9.8 5.1,-3.57, body extent -5.5,-10.05 5.5,6.3, height 0.25
FP-RC0603-0_55-IPC_B [mm]
  rect 0.859x0.912 smd paste+0 mask+0: 1(-0.777,0) 2(0.777,0)
  silkscreen extent -1.21,-0.86 1.21,0.86, body extent -1.46,-0.71 1.46,0.71, height 0.25
FP-RT0603-MFG [mm]
  rect 0.9x0.8 smd paste+0 mask+0: 1(-0.85,0) 2(0.85,0)
  silkscreen extent -0.85,-0.81 0.86,0.8, body extent -1.4,-0.55 1.4,0.55, height 0.25
FP-S17-0173-SINGLE-MFG [mm]
  rect 1.27x0.61 smd paste+0 mask+0: 1(-2.67,1.905) 2(-2.67,0.635) 3(-2.67,-0.635) 4(-2.67,-1.905)
  round 3.356 smd paste+0 mask+0: 5-6-7-8(0.645,0.069)
  Top Layer region: -1.219,1.956 2.286,1.956 2.286,2.21 3.302,2.21 3.302,1.6 2.591,1.6 2.591,0.94 3.302,0.94 3.302,0.33 2.591,0.33 2.591,-0.33 3.302,-0.33 3.302,-0.94 2.591,-0.94 2.591,-1.6 3.302,-1.6 3.302,-2.21 2.286,-2.21 2.286,-1.956 -1.219,-1.956
  silkscreen extent -4.02,-3.1 3,3.1, body extent -3.4,-2.73 3.4,2.73, height 0.25
FP-SMBJ-MFG [mm]
  rect 2.16x2.26 smd paste+0 mask+0: 1(-2.45,0) 2(2.45,0)
  silkscreen extent -4.22,-1.97 2.37,1.97, body extent -3.63,-2.07 3.63,2.07, height 0.25
FP-TPSC-MFG [mm]
  rect 2x2.8 smd paste+0 mask+0: 1(-2.25,0) 2(2.25,0)
  silkscreen extent -0.87,-1.7 4.23,1.7, body extent -3.35,-1.8 3.35,1.8, height 0.25
INDPM8682X400N [mm]
  rect 2.4x5.1 smd: 1(-3.75,0) 2(3.75,0)
  silkscreen extent -4.32,-4.09 4.32,4.09, body extent -4.3,-4.1 4.3,4.1, height 3.9
JCET-SMB-2_M [mm] "Molded Diode, 2-Leads, Body 4.57x3.94mm"
  rect 2.85x2.25 smd: 1(-1.675,0) 2(1.675,0)
  silkscreen extent -2.3,-2 3.6,2, body extent -2.5,-1.97 2.5,1.97, height 2.44